# Altium PCB BEE-DAL_EXP.PcbDoc (part 1 of 5)
Units mm, origin at the board's own origin, x right, y up, seen from the top; angles counter-clockwise.
Board outline 93 x 90 mm, 6 copper layers (L1 TOP, L2 GND, L3 SIGNAL, L4 PWR, L5 GND, L6 BOT), stack 1.516 mm thick; 548 components, 447 nets, 1827 pads, 1142 vias.
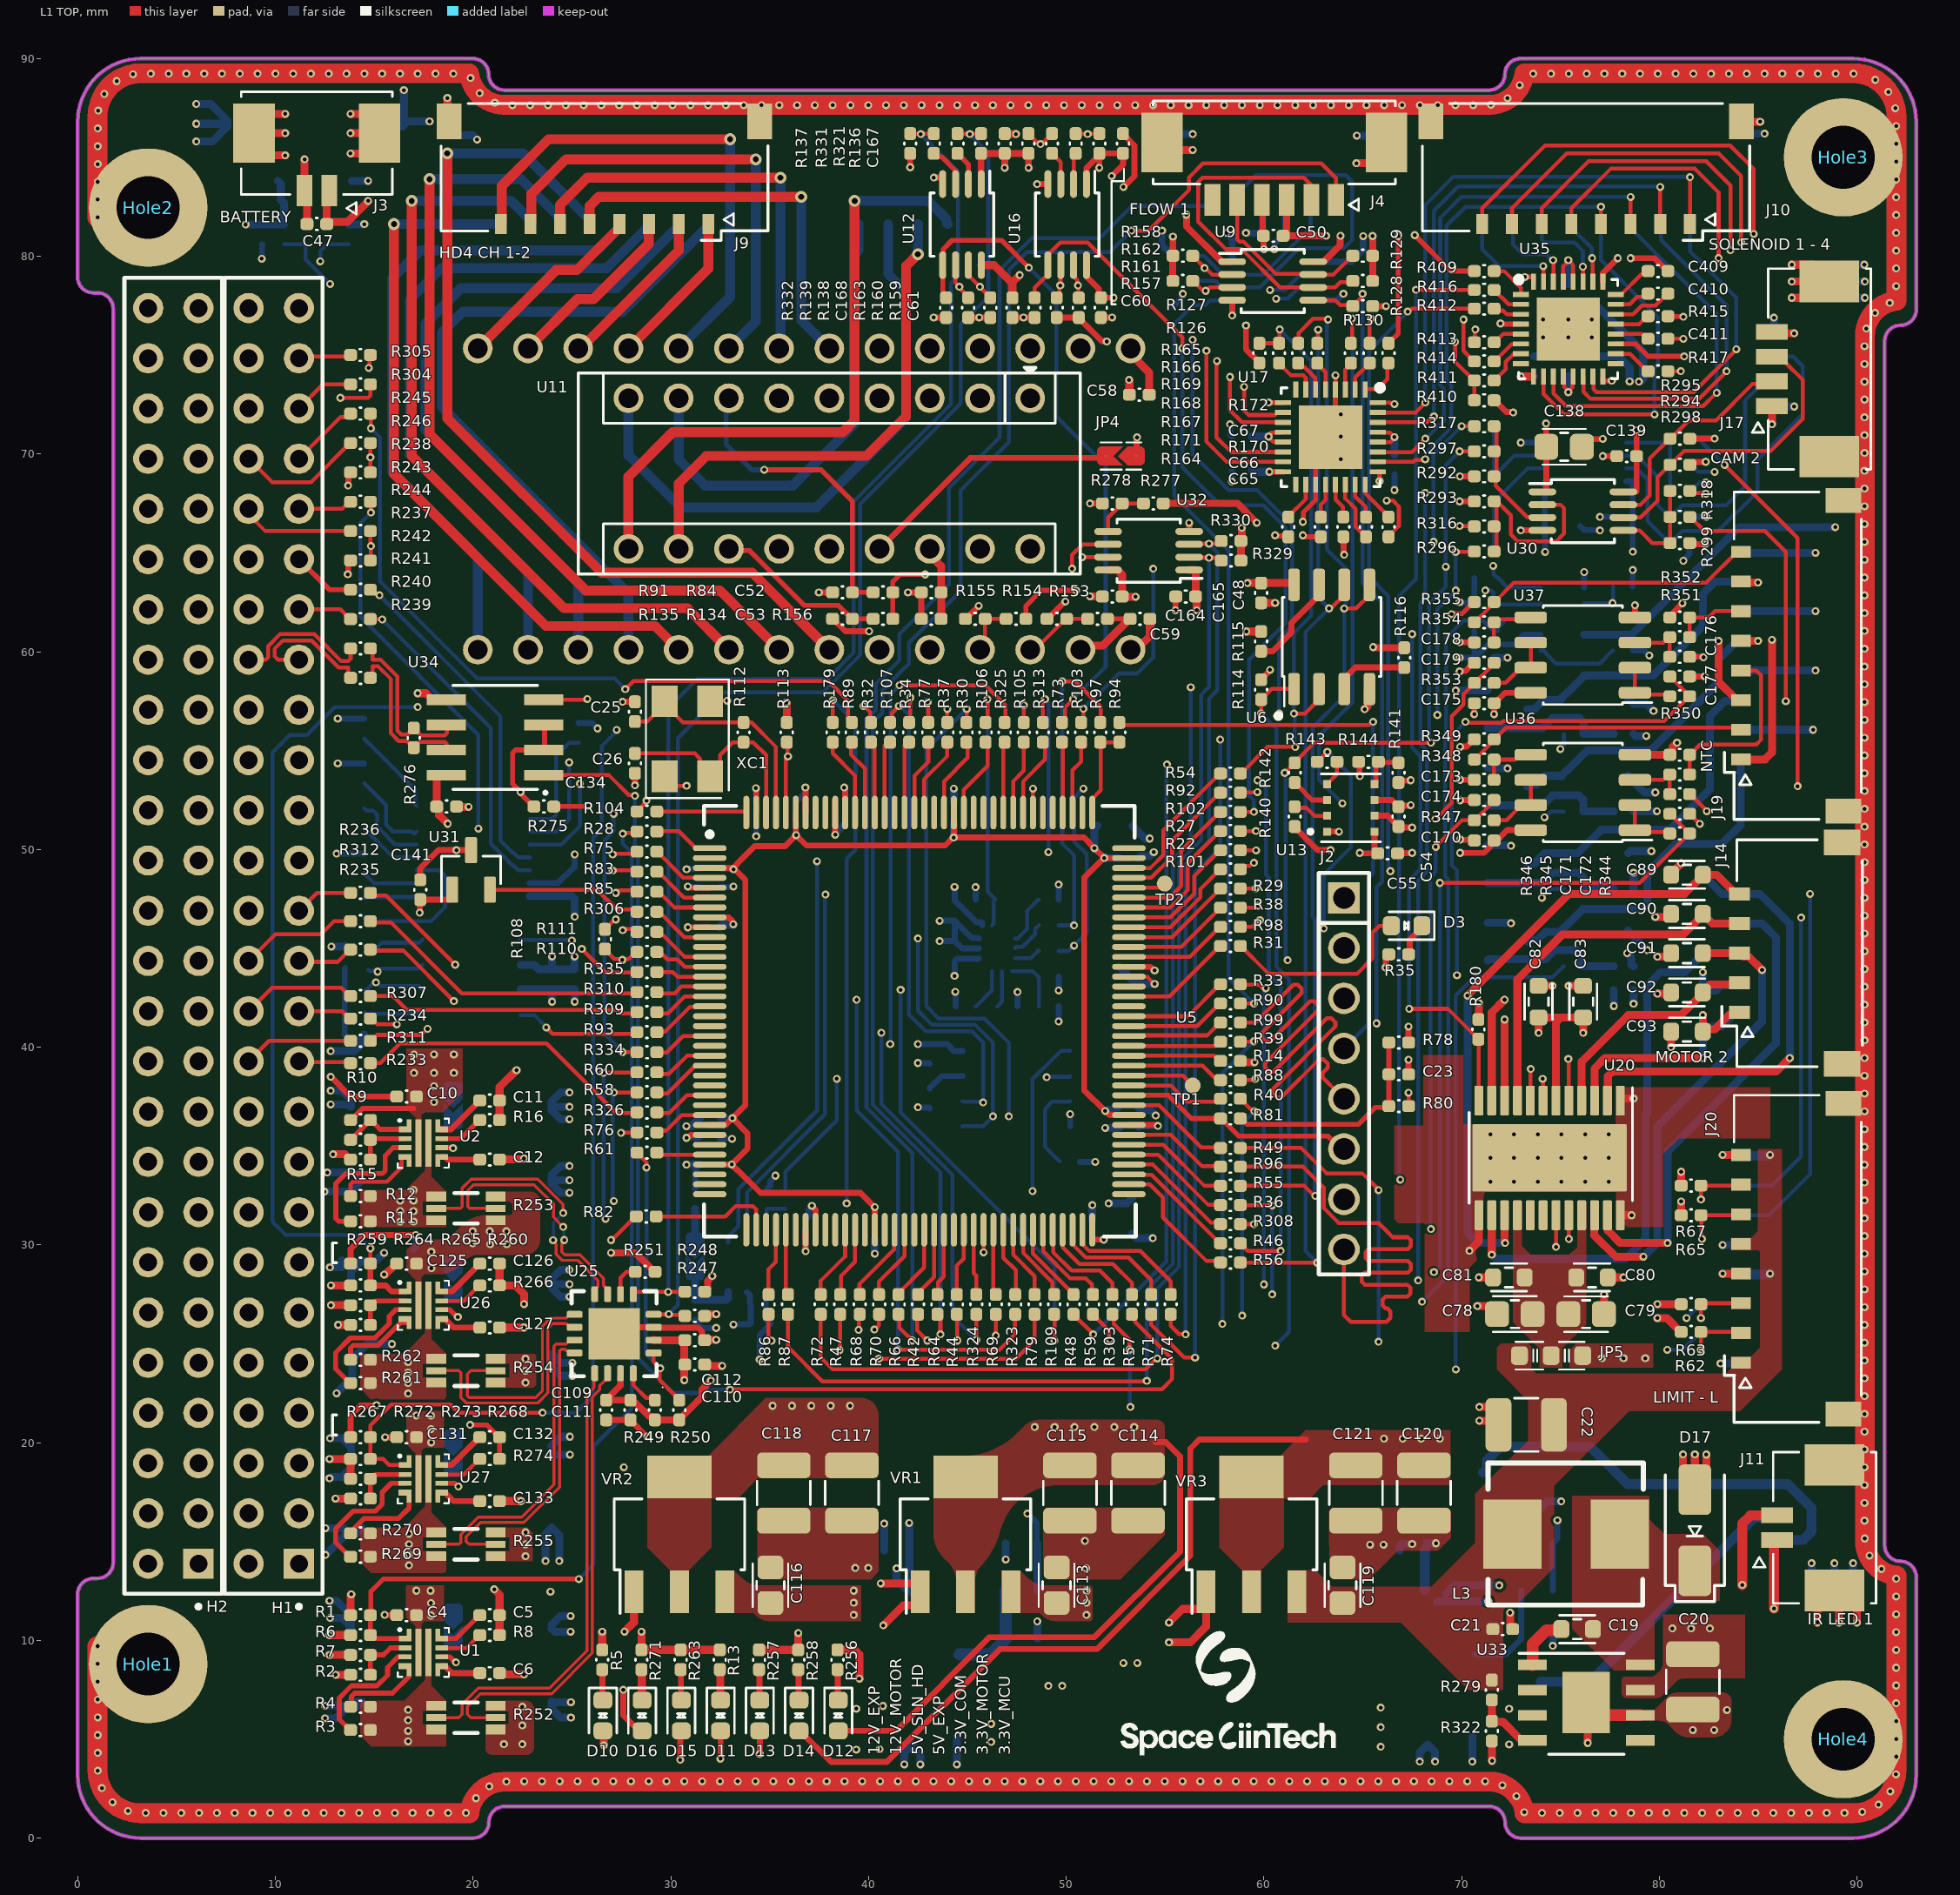
[diagram p0: L1 TOP view]
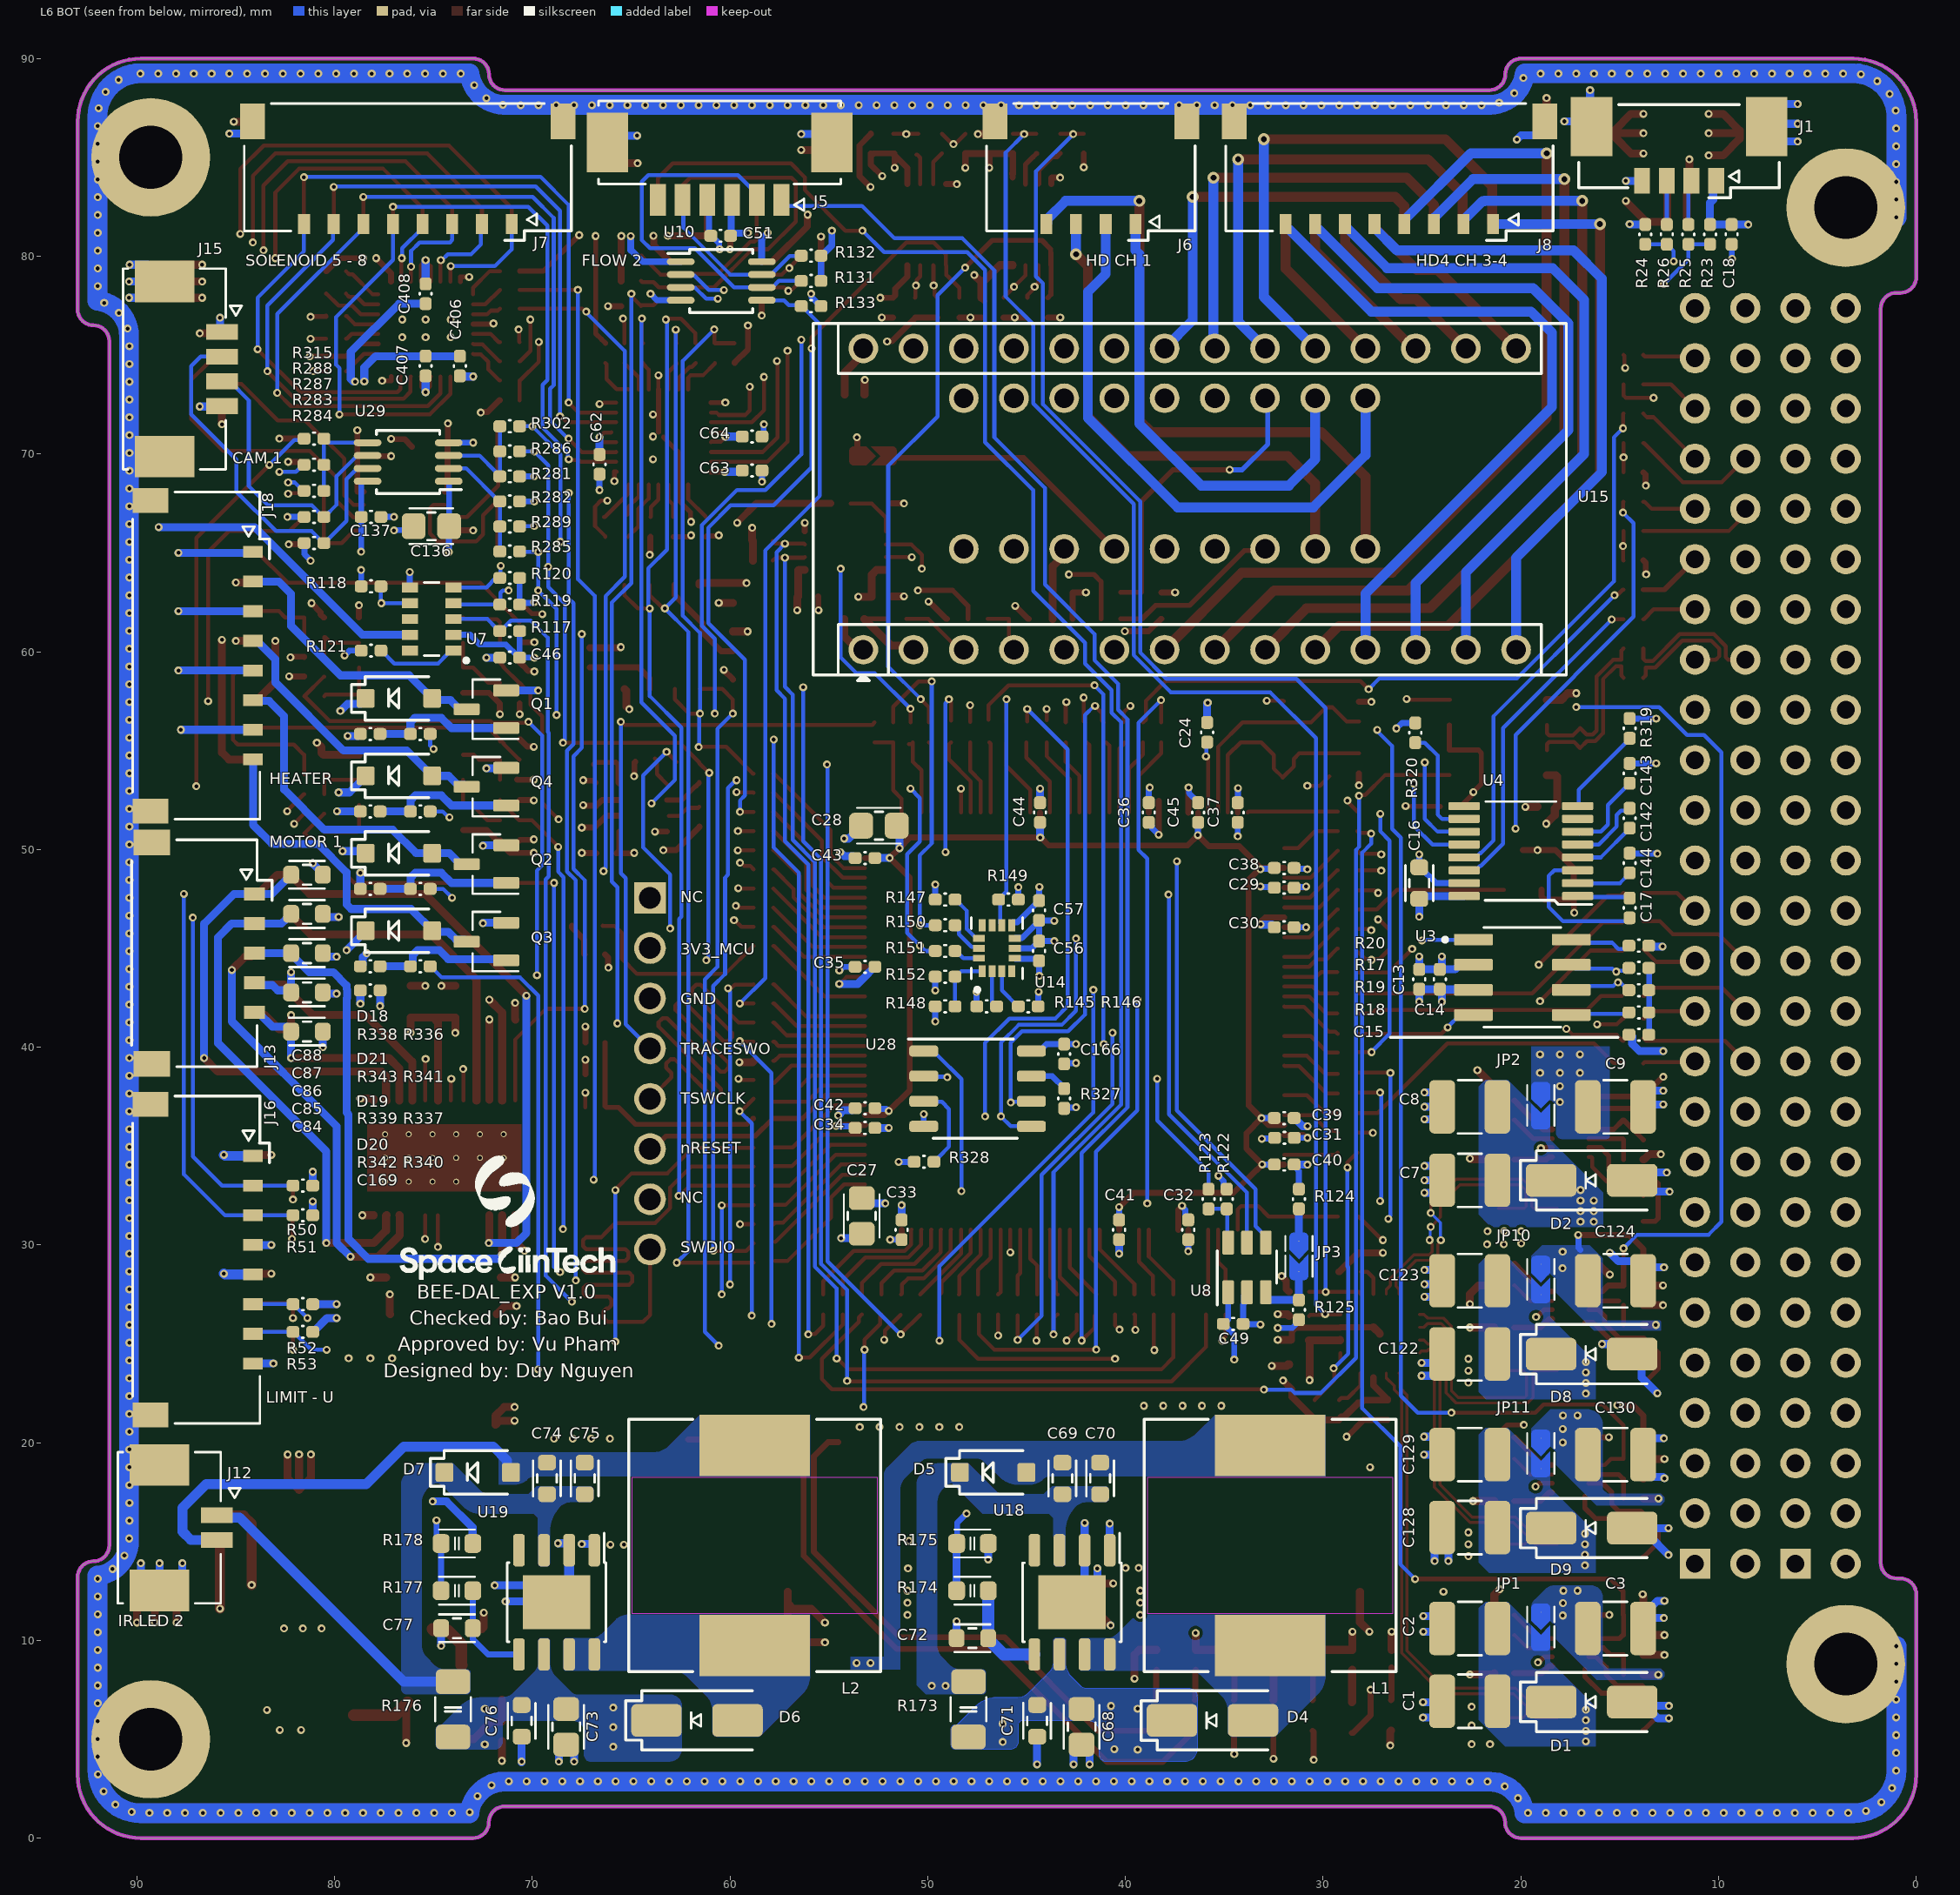
[diagram p1: L6 BOT view, seen from below]
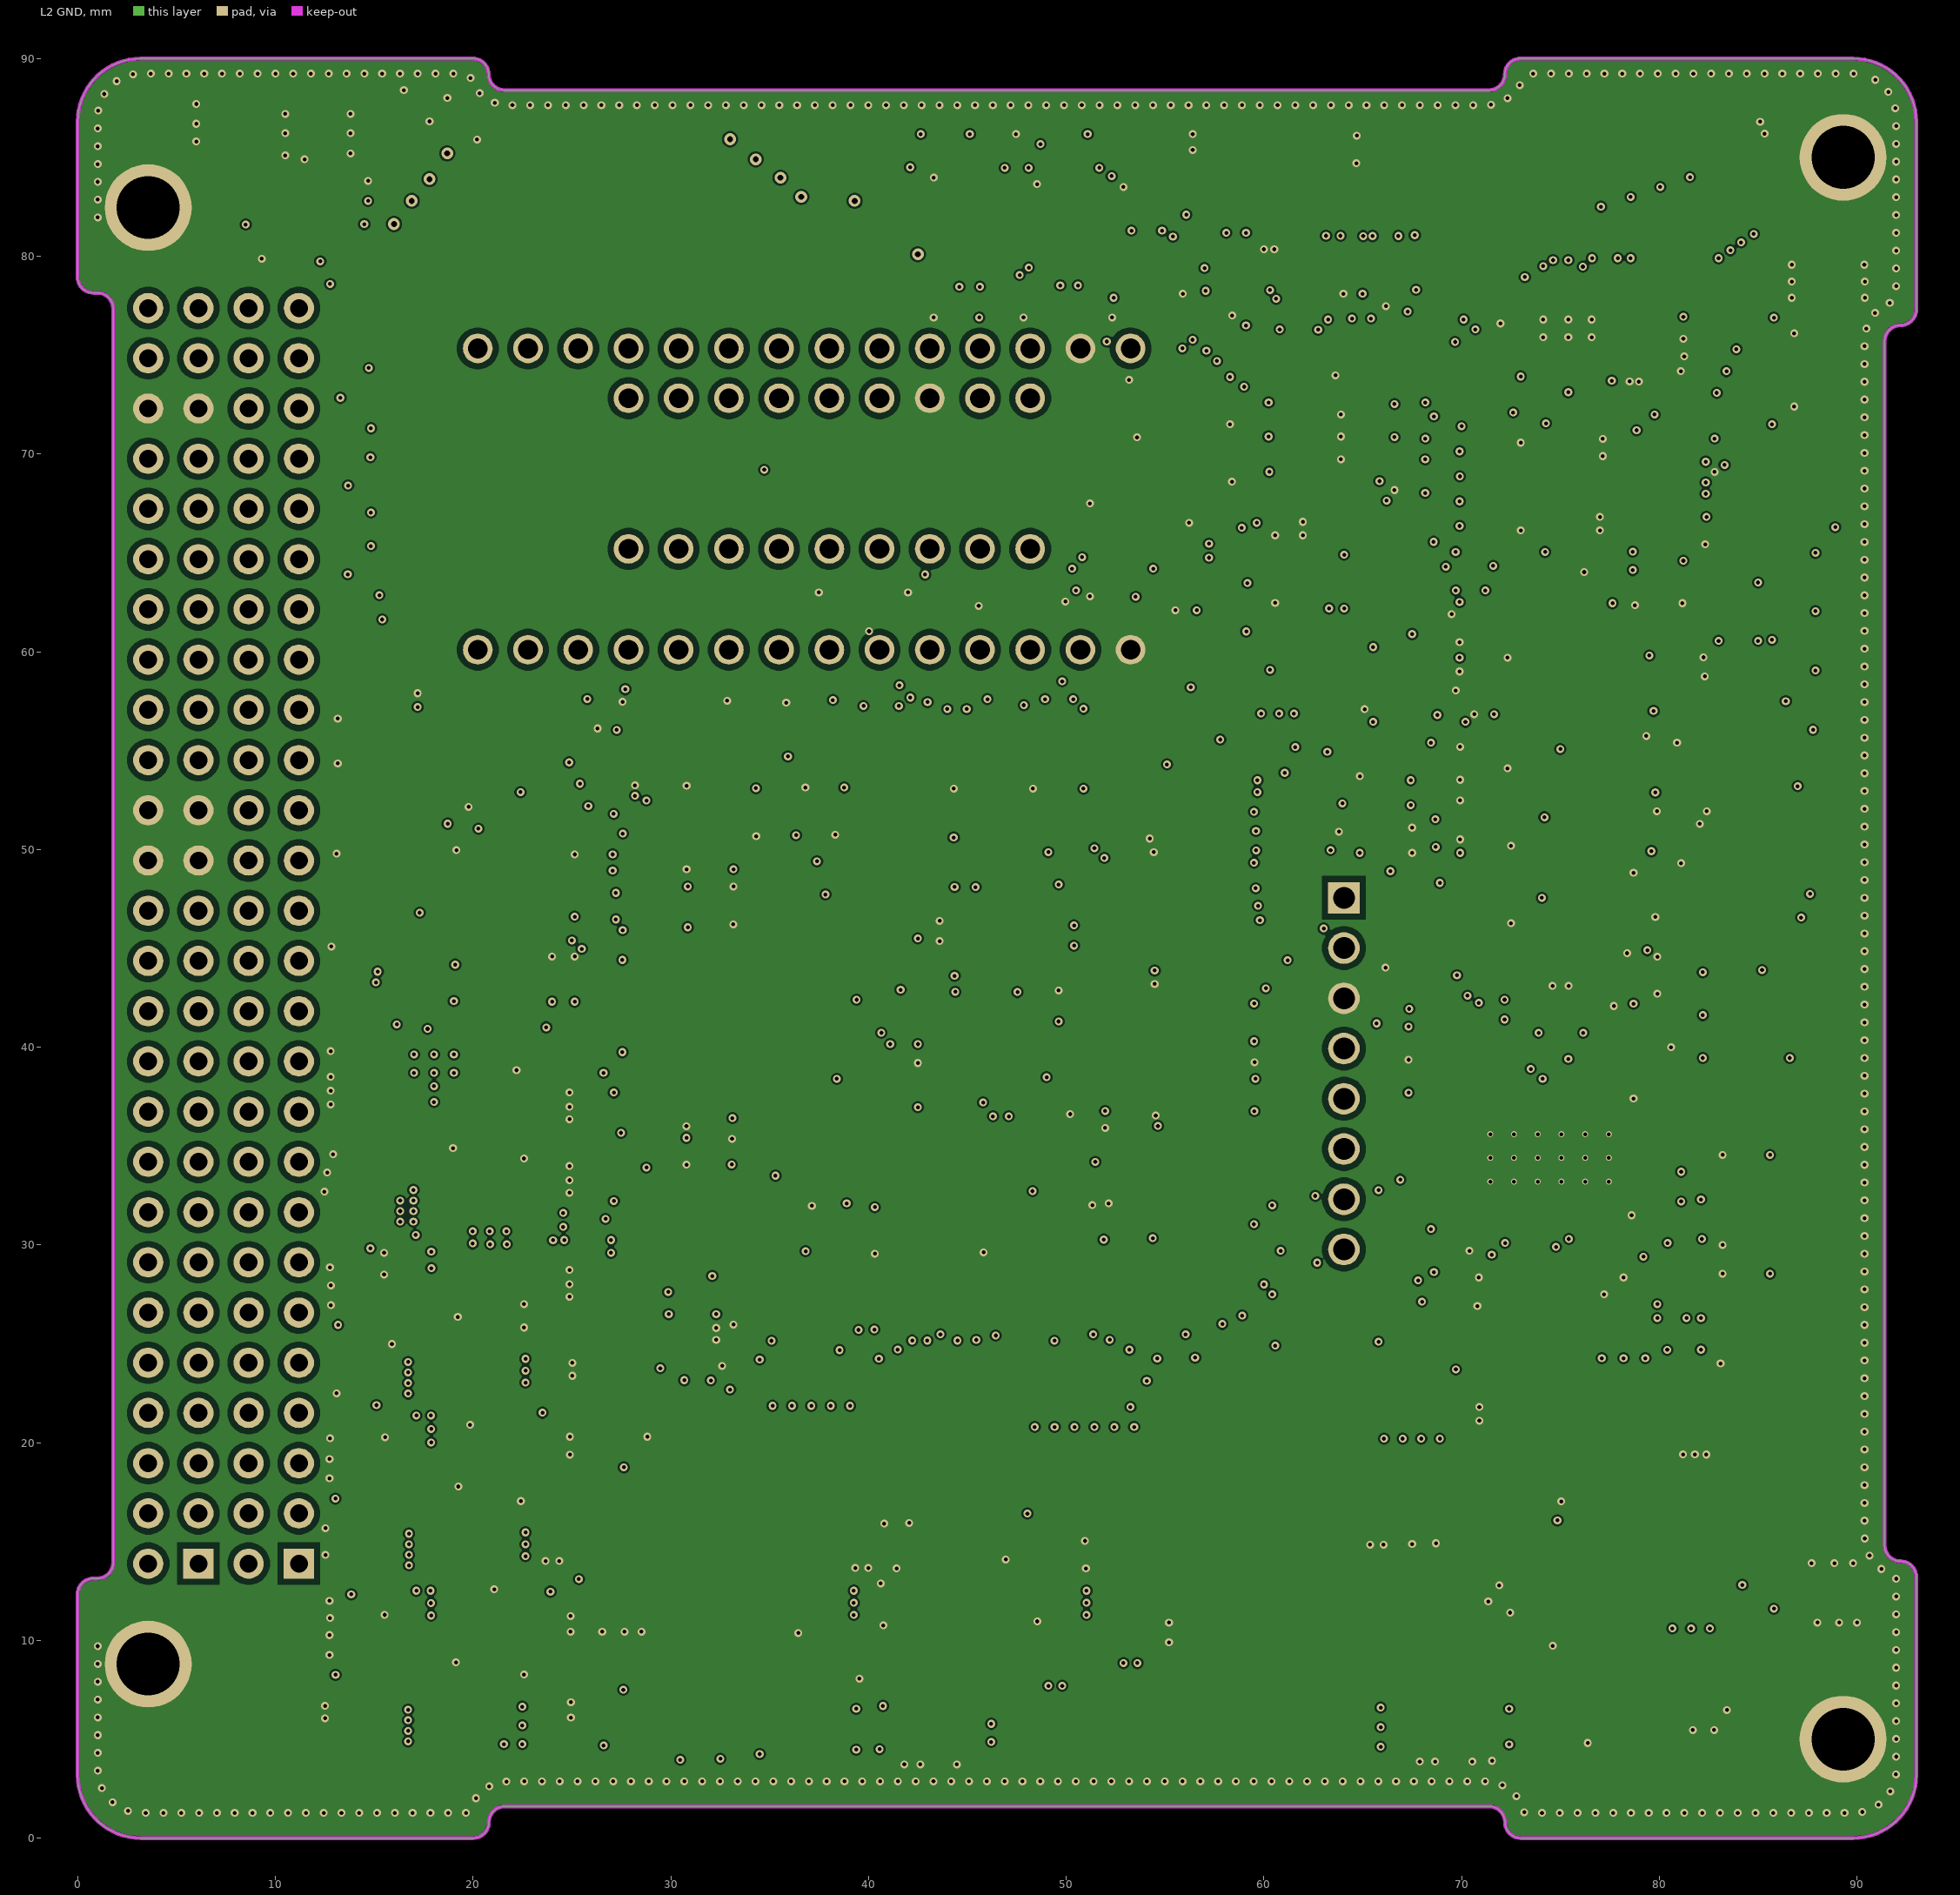
[diagram p2: L2 GND]
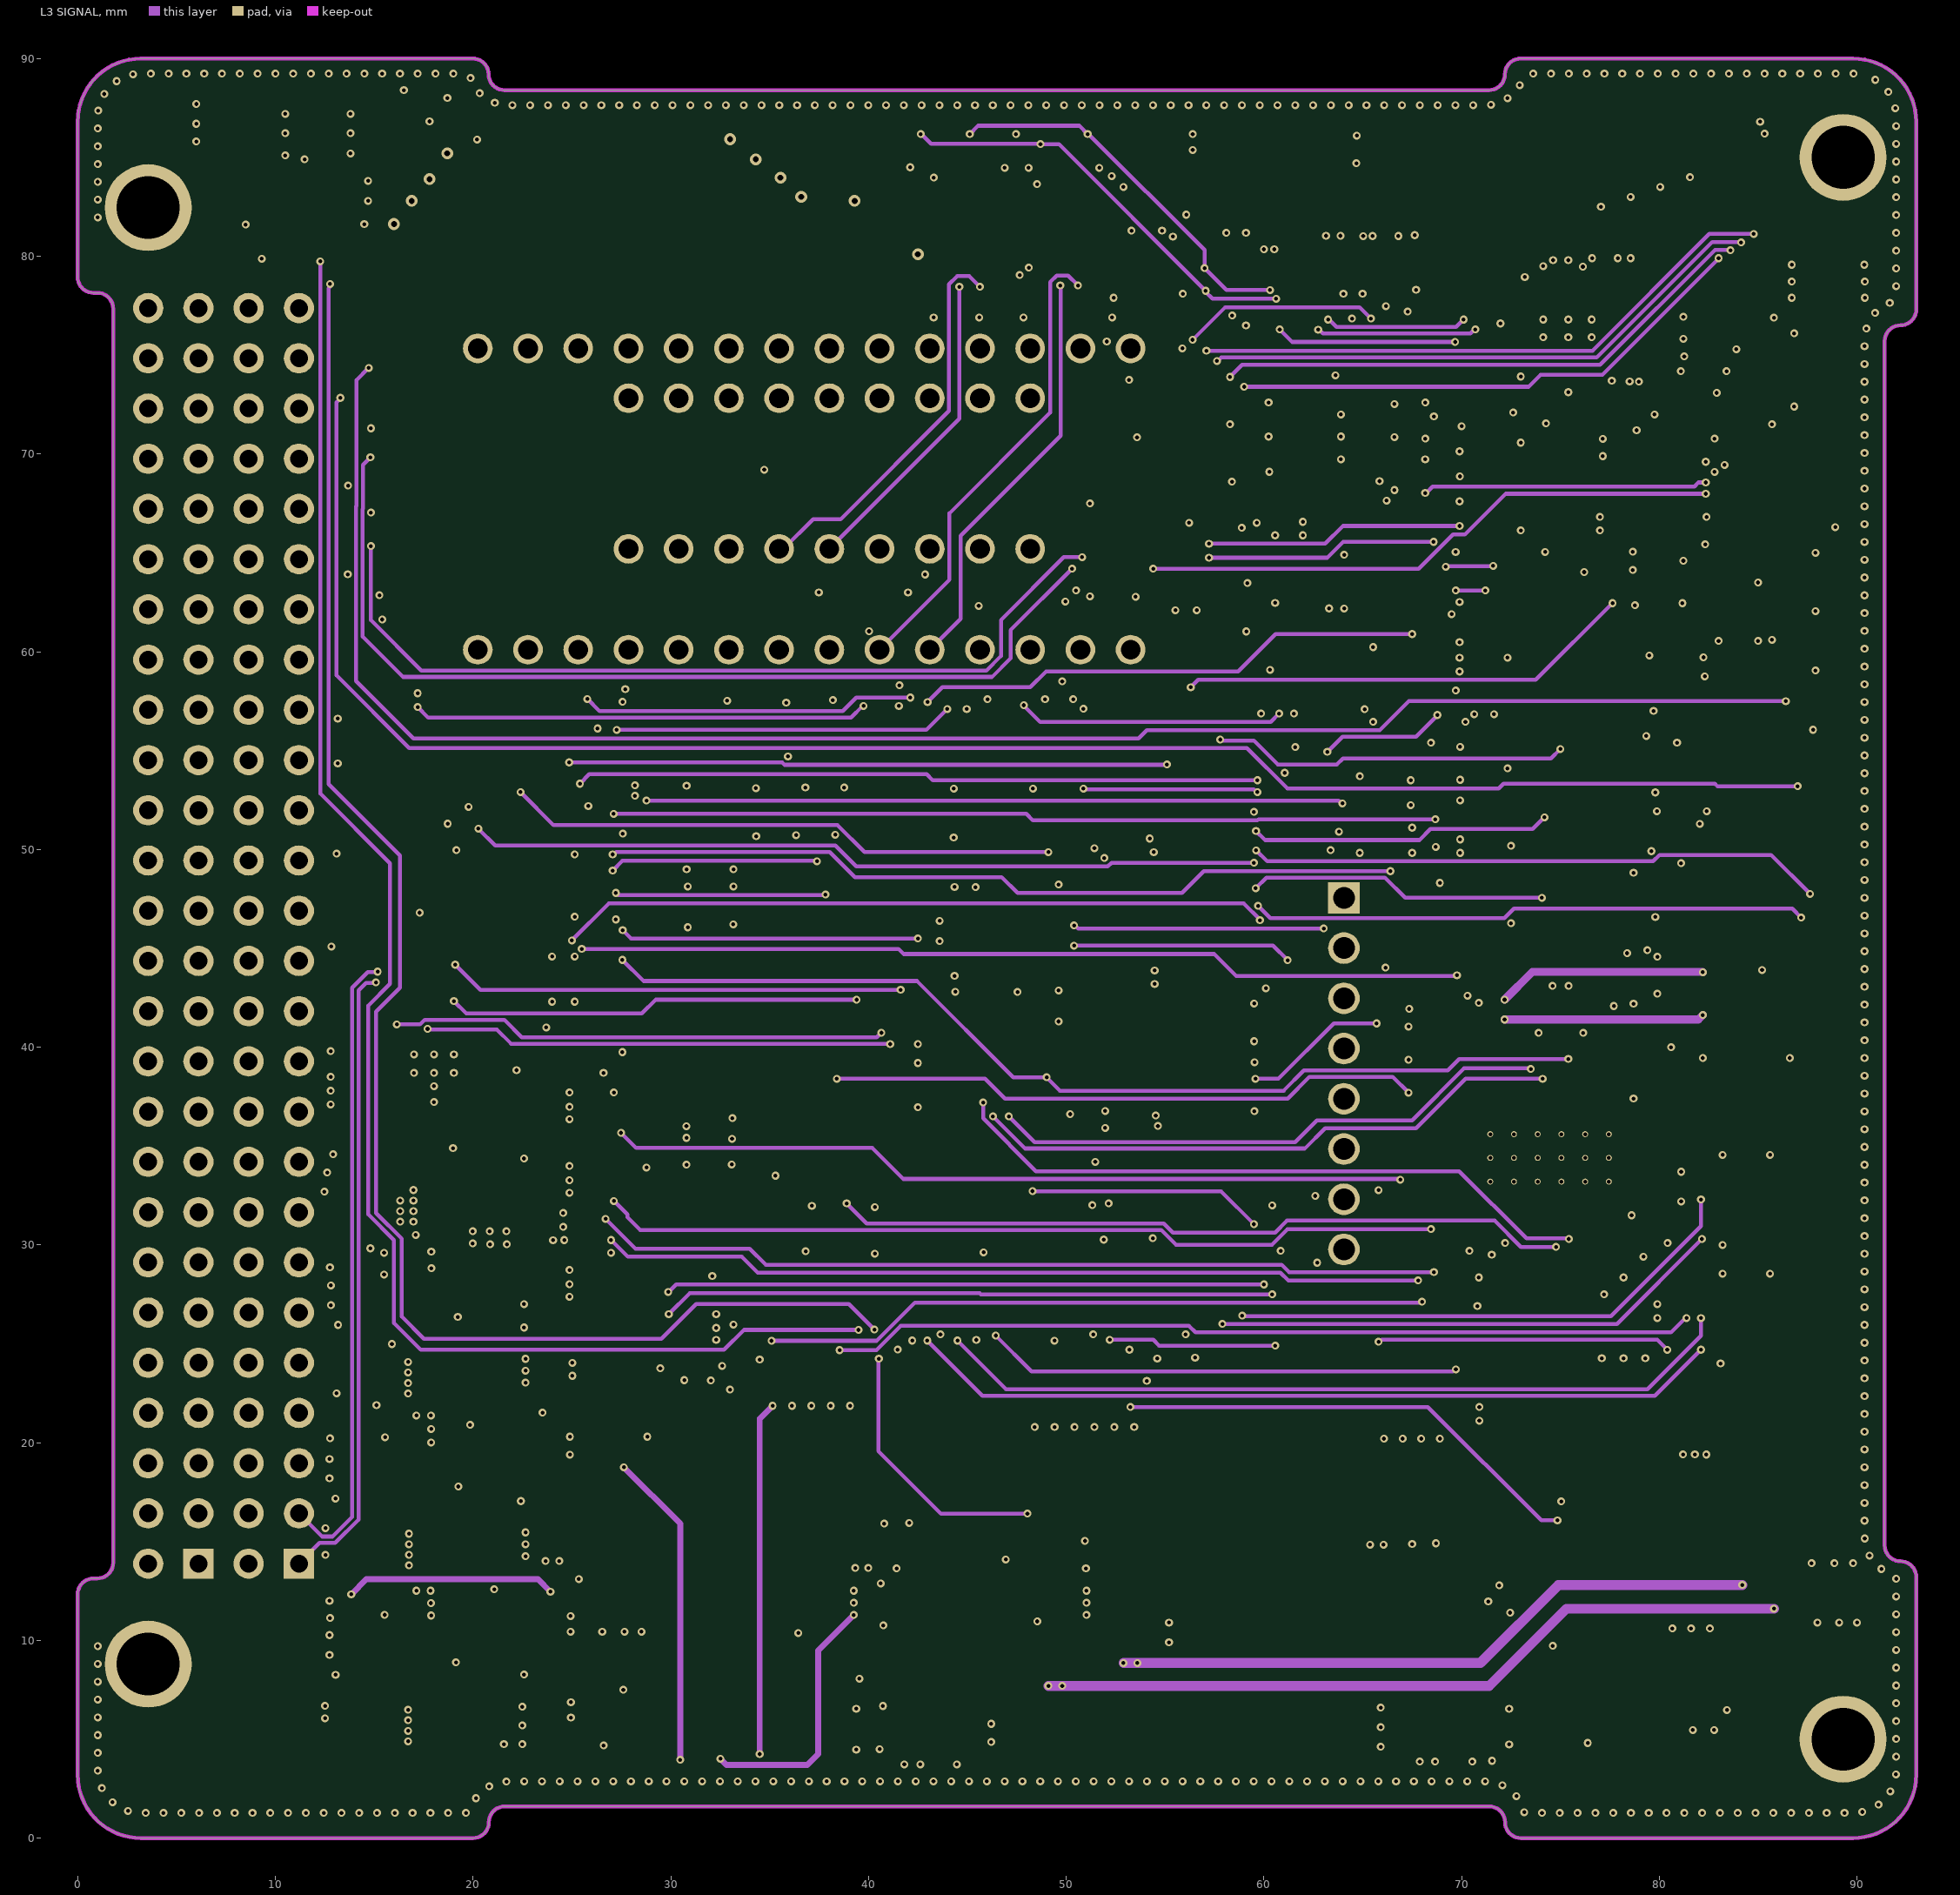
[diagram p3: L3 SIGNAL]
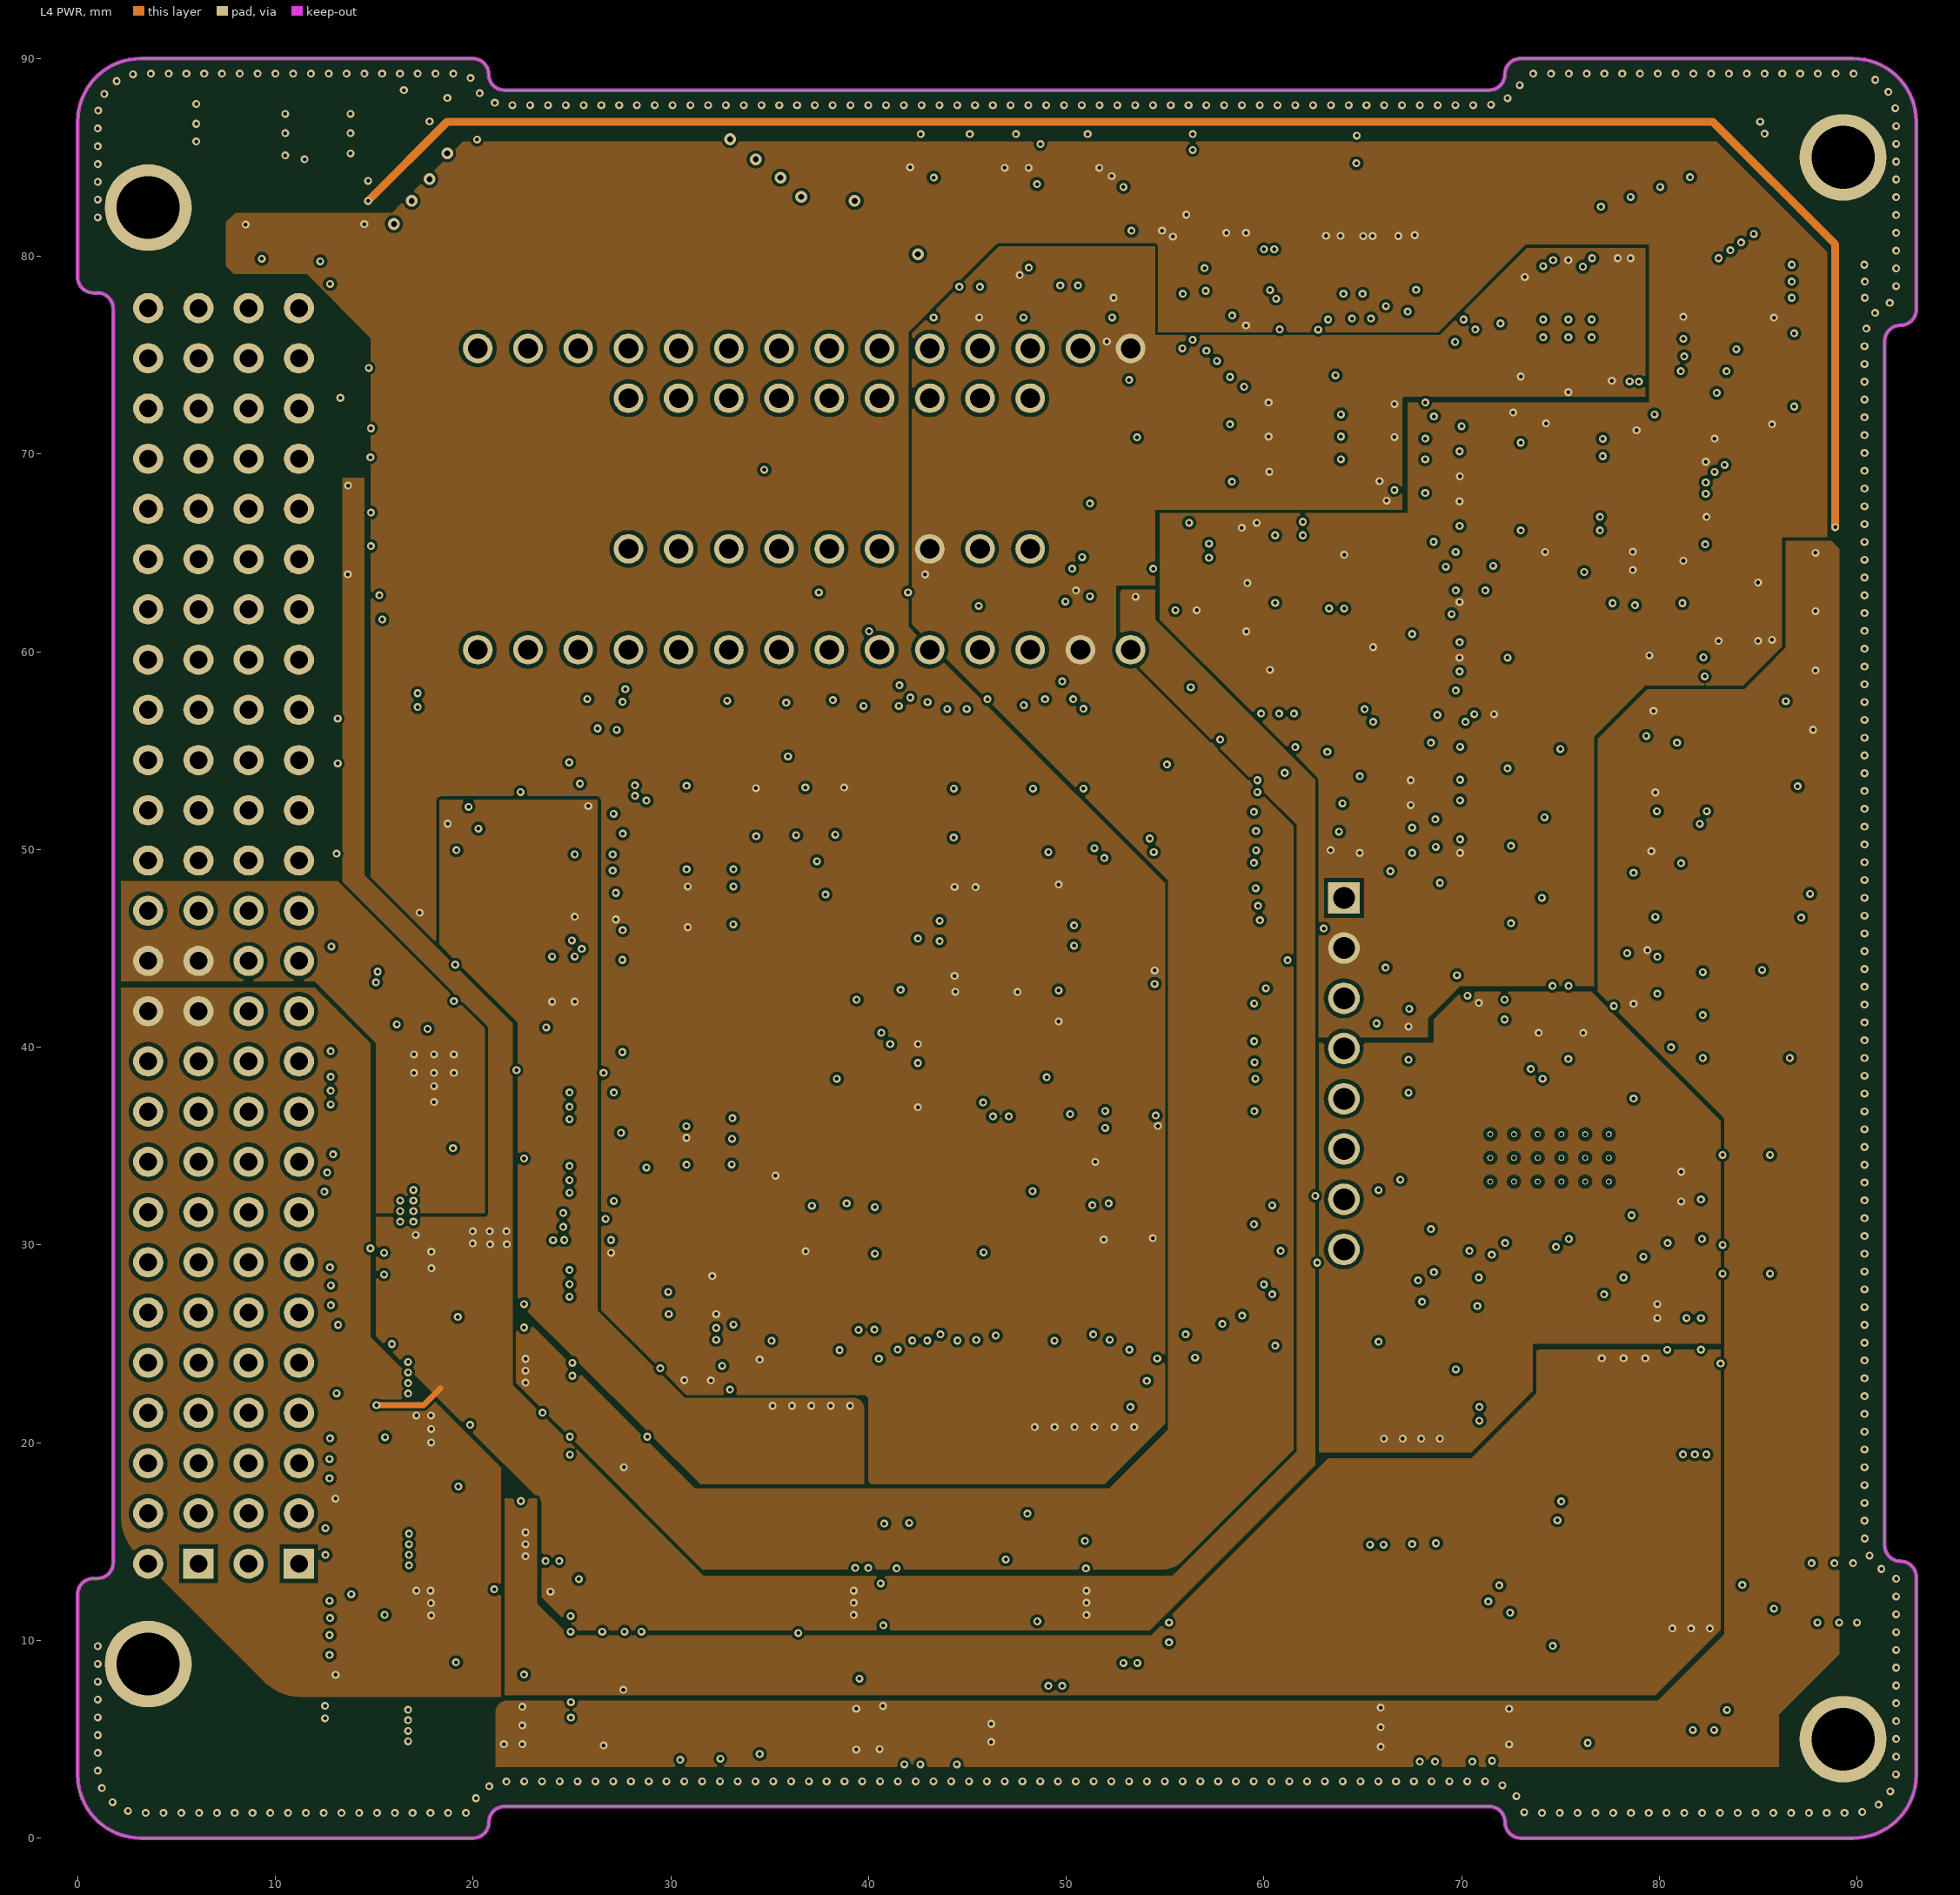
[diagram p4: L4 PWR]
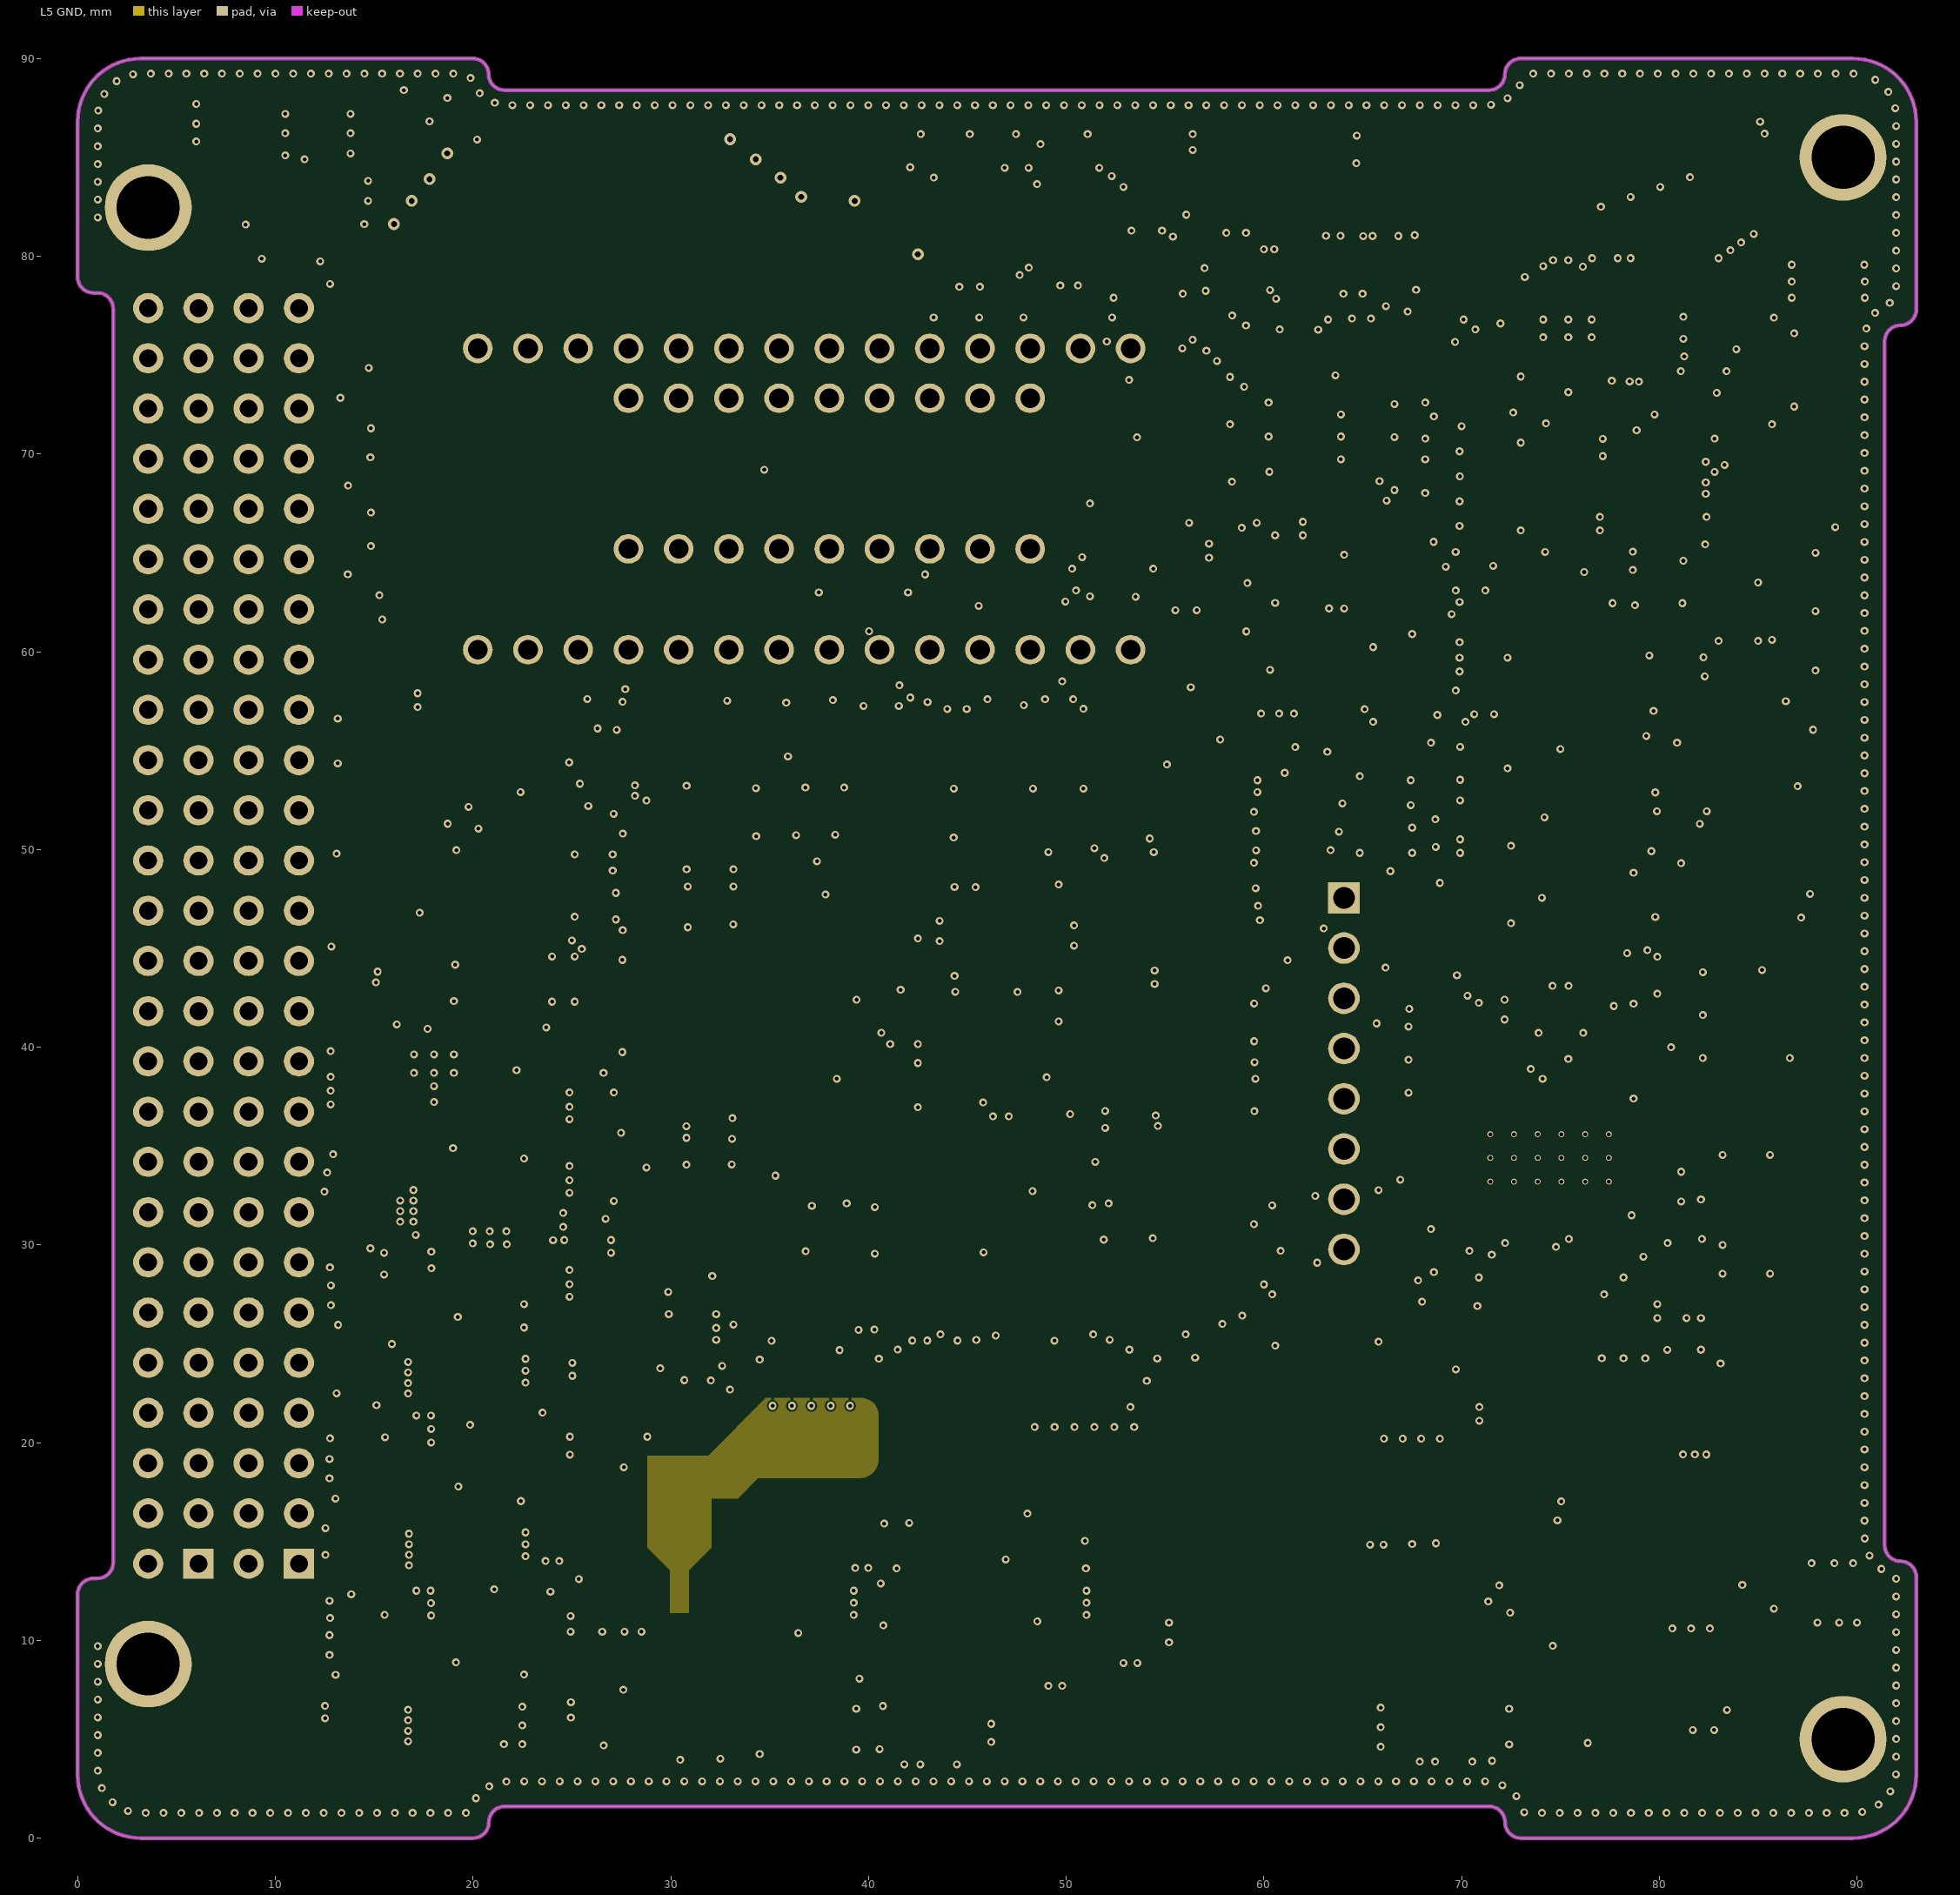
[diagram p5: L5 GND]

## Layer stack, top to bottom
Top Solder: solder mask 0.012, Solder Resist, Dk 4.3
L1 TOP: signal copper 0.018
Dielectric 2: prepreg 0.09, PP-006, Dk 4.5
L2 GND: signal copper 0.035
Dielectric 4: core 0.11, PP-006, Dk 4.1
L3 SIGNAL: signal copper 0.035
Dielectric 1: prepreg 0.94, FR-4, Dk 4.2
L4 PWR: signal copper 0.035
Dielectric 5: core 0.11, PP-006, Dk 4.1
L5 GND: signal copper 0.035
Dielectric 3: prepreg 0.09, PP-006, Dk 4.5
L6 BOT: signal copper 0.018
Bottom Solder: solder mask 0.012, Solder Resist, Dk 4.3

## Board outline
0,12.33 cw(c0.8,12.33) 0.8,13.13 1,13.13 ccw(c1,13.93) 1.8,13.93 1.8,77.35 ccw(c1,77.35) 1,78.15 0.8,78.15 cw(c0.8,78.95) 0,78.95 0,86.8 cw(c3.2,86.8) 3.193,90 3.175,90 19.989,90 cw(c19.989,89.2) 20.789,89.2 ccw(c21.589,89.2) 21.589,88.4 21.59,88.399 42.015,88.4 71.399,88.4 71.389,88.4 ccw(c71.389,89.2) 72.189,89.2 cw(c72.989,89.2) 72.989,90 89.789,90 89.807,90 cw(c89.8,86.8) 93,86.807 93,77.307 cw(c92.2,77.307) 92.2,76.507 ccw(c92.2,75.707) 91.4,75.707 91.4,14.8 ccw(c92.2,14.8) 92.2,14 cw(c92.2,13.2) 93,13.2 93,3.2 cw(c89.8,3.2) 89.8,0 73,0 cw(c73,0.8) 72.2,0.8 ccw(c71.4,0.8) 71.4,1.6 71.399,1.6 50.975,1.6 21.59,1.6 21.6,1.6 ccw(c21.6,0.8) 20.8,0.8 cw(c20,0.8) 20,0 3.2,0 cw(c3.2,3.2) 0,3.2

## Design rules (kind name [scope] priority, off if disabled: settings)
Clearance Clearance_RAM [WithinRoom('RoomRAM')] p1: gap=0.1 ignorepadtopadclearanceinfootprint=TRUE
Clearance Clearance_KEEPOUT [IsKeepOut] p2: gap=0 ignorepadtopadclearanceinfootprint=TRUE
Clearance Clearance_SAM [WithinRoom('RoomSAM')] p3: gap=0.1 ignorepadtopadclearanceinfootprint=TRUE
Clearance Clearance_BGA [WithinRoom('RoomFPGA')] p4: gap=0.075 ignorepadtopadclearanceinfootprint=FALSE
Clearance Clearance_GND_POUR [InPolygon AND (InNet('GND'))] p5: gap=0.125 ignorepadtopadclearanceinfootprint=TRUE except(0.1: SMDPad-Fill SMDPad-Poly SMDPad-Region Via-Fill Via-Poly Via-Region; 0.3: THPad-Fill THPad-Poly THPad-Region; 0.6: Arc-Fill Arc-Poly Arc-Region Track-Fill Track-Poly Track-Region)
Clearance [All] p6: gap=0.125 ignorepadtopadclearanceinfootprint=TRUE except(0.15: Arc-Fill Arc-Poly Track-Poly Track-Text SMDPad-Poly THPad-Fill Via-Fill Via-Poly Fill-Fill Fill-Poly Poly-Poly; 0.2: THPad-Poly; 0.52: Track-Fill)
ComponentClearance [All] p1: gap=0.05 collisioncheckmode=3 verticalgap=-0.1 showdistances=TRUE donotcheckwithout3dbody=TRUE
DiffPairsRouting DiffPairsRouting_Diff120 [InDifferentialPairClass('DIFFPAIR_120')] p1: maxlimit=0.254 minlimit=0.127 mostfreqgap=0.127 toplayer_maxgap=0.127 toplayer_minwidth=0.064 toplayer_maxwidth=0.064 toplayer_prefwidth=0.064 midlayer1_maxgap=0.127 midlayer1_minwidth=0.025 midlayer1_maxwidth=0.025 midlayer1_prefwidth=0.025 midlayer2_mingap=0.254 midlayer2_prefgap=0.254 midlayer2_minwidth=0.381 midlayer2_maxwidth=0.381 midlayer2_prefwidth=0.381 midlayer3_maxgap=0.127 midlayer3_minwidth=0.025 midlayer3_maxwidth=0.025 midlayer3_prefwidth=0.025 midlayer5_mingap=0.254 midlayer5_prefgap=0.254 midlayer5_minwidth=0.381 midlayer5_maxwidth=0.381 midlayer5_prefwidth=0.381 bottomlayer_maxgap=0.127 bottomlayer_minwidth=0.064 bottomlayer_maxwidth=0.064 bottomlayer_prefwidth=0.064 maxuncoupledlength=12.7
FanoutControl Fanout_BGA [IsBGA or WithinRoom('room_FPGA')] p1: bgadir=Out bgaviamode=Centered fanoutstyle=Auto fanoutdirection=Alternating viagrid=0.025 // Fanout_BGA (Default Rule)
HoleSize [All] p1: absolutevalues=TRUE maxlimit=5 minlimit=0.2 maxpercent=80.000 minpercent=20.000
HoleToHoleClearance [All] p1: gap=0.2 allowstackedmicrovias=TRUE
MatchedLengths xSignal_SWD [InxSignalClass('xSignals_SWD')] p1: tolerance=0.1 checknetsindiffpair=FALSE checkdiffpairvsdiffpair=TRUE checkxsignals=TRUE checkothers=TRUE targetsourcename=MCU_TRACESWO-PB05_PP1
MatchedLengths xSignal_SUB_LVDS [InxSignalClass('xSignals_SUB_LVDS')] p2: tolerance=0.2 checknetsindiffpair=TRUE checkdiffpairvsdiffpair=FALSE checkxsignals=FALSE checkothers=FALSE
MatchedLengths xSignal_USP_EXP_MICRO [InxSignalClass('xSignals_USB_EXP_MICRO')] p3: tolerance=0.1 checknetsindiffpair=TRUE checkdiffpairvsdiffpair=FALSE checkxsignals=FALSE checkothers=FALSE
MatchedLengths xSignal_IF_OUT_CONN_USB [InxSignalClass('xSignals_IF_OUT_CONN_USB')] p4: tolerance=0.2 checknetsindiffpair=TRUE checkdiffpairvsdiffpair=FALSE checkxsignals=FALSE checkothers=FALSE
MatchedLengths xSignal_FPGA_LVDS_TX [InxSignalClass('xSignals_FPGA_LVDS_TX')] p5: tolerance=0.1 checknetsindiffpair=TRUE checkdiffpairvsdiffpair=FALSE checkxsignals=FALSE checkothers=FALSE
MatchedLengths xSignal_FPGA_LVDS_RX [InxSignalClass('xSignals_FPGA_LVDS_RX')] p6: tolerance=0.2 checknetsindiffpair=TRUE checkdiffpairvsdiffpair=FALSE checkxsignals=FALSE checkothers=FALSE
MatchedLengths xSignal_USB_HOST_SAM_CONN [InxSignalClass('xSignals_USB_HOST_SAM_CONN')] p7: tolerance=0.1 checknetsindiffpair=TRUE checkdiffpairvsdiffpair=FALSE checkxsignals=FALSE checkothers=FALSE
MatchedLengths xSignal_USB_EXP_SW [InxSignalClass('xSignals_EXP_USB_SW')] p8: tolerance=0.1 checknetsindiffpair=TRUE checkdiffpairvsdiffpair=FALSE checkxsignals=FALSE checkothers=FALSE
MatchedLengths xSignal_JTAG_SAM [InxSignalClass('xSignals_JTAG_SAM')] p9: tolerance=0.1 checknetsindiffpair=FALSE checkdiffpairvsdiffpair=TRUE checkxsignals=TRUE checkothers=TRUE targetsourcename=TDI_PC28_PP1
MatchedLengths xSignal_JTAG_FPGA [InxSignalClass('xSignals_JTAG_FPGA')] p10: tolerance=0.1 checknetsindiffpair=FALSE checkdiffpairvsdiffpair=TRUE checkxsignals=TRUE checkothers=TRUE targetsourcename=JTAG_TCK_PP1
MatchedLengths xSignal_SPI_CONNECTOR [InxSignalClass('xSignals_SPI_CONNECTOR')] p11: tolerance=5 checknetsindiffpair=FALSE checkdiffpairvsdiffpair=TRUE checkxsignals=TRUE checkothers=TRUE targetsourcename=CLK_EXP_CONNECTOR-NetR95_1-_PA26_PP1
MatchedLengths xSignal_eMMC [InxSignalClass('xSignals_eMMC')] p12: tolerance=0.1 checknetsindiffpair=FALSE checkdiffpairvsdiffpair=TRUE checkxsignals=TRUE checkothers=TRUE targetsourcename=SOM_SDMMC0_OUT_D7-_PA10_PP1
MatchedLengths xSignal_SAM_SPI_SW_FLASH [InxSignalClass('xSignals_SAMA7_FLASH_SPI')] p13: tolerance=0.1 checknetsindiffpair=FALSE checkdiffpairvsdiffpair=TRUE checkxsignals=TRUE checkothers=TRUE targetsourcename=SAMA7_FLASH_SPI_MCLK-_PB5_PP1
MatchedLengths xSignal_RS422 [InxSignalClass('xSignals_RS422')] p14: tolerance=0.1 checknetsindiffpair=TRUE checkdiffpairvsdiffpair=FALSE checkxsignals=FALSE checkothers=FALSE
MatchedLengths xSignal_RS422_EXP_PC104 [InxSignalClass('xSignals_RS422_EXP_PC104')] p15: tolerance=0.2 checknetsindiffpair=TRUE checkdiffpairvsdiffpair=FALSE checkxsignals=FALSE checkothers=FALSE
MatchedLengths xSignal_SDCARD [InxSignalClass('xSignals_SDCARD')] p16: tolerance=0.1 checknetsindiffpair=FALSE checkdiffpairvsdiffpair=TRUE checkxsignals=TRUE checkothers=TRUE targetsourcename=SD2_DATA2-_PC1_PP1
MatchedLengths xSignal_MRAM [InxSignalClass('xSignal_MRAM')] p17: tolerance=0.1 checknetsindiffpair=FALSE checkdiffpairvsdiffpair=TRUE checkxsignals=TRUE checkothers=TRUE targetsourcename=SOM_MRAM_QSPI_CLK-_PB14_PP1
MatchedLengths MRAM [InNetClass('QSPI')] p18: tolerance=0.5 checknetsindiffpair=FALSE checkdiffpairvsdiffpair=TRUE checkxsignals=TRUE checkothers=TRUE
MinimumSolderMaskSliver MinimumSolderMaskSliver_BGA [WithinRoom('ROOM_SAMA7')] p1: minsoldermaskwidth=0.05
MinimumSolderMaskSliver [All] p2: minsoldermaskwidth=0.05
PolygonConnect PolygonConnect_1 [HasFootprint('5040500691', 'MOLEX_5040500491','MOLEX_5040500891','MOLEX_0532610471','5040500591','5040500991','47346-0001_MOL','MOLEX_5040500991','5040500691','MOLEX_0532610271') vs IsNamedPolygon('GND_POUR')] p1: thpad.connectstyle=Relief thpad.reliefconductorwidth=0.254 thpad.reliefentries=4 thpad.polygonreliefangle="90 Angle" thpad.airgapwidth=0.254 smdpad.connectstyle=Direct smdpad.reliefconductorwidth=0.254 smdpad.reliefentries=4 smdpad.polygonreliefangle="90 Angle" smdpad.airgapwidth=0.254 via.connectstyle=Direct via.reliefconductorwidth=0.254 via.reliefentries=4 via.polygonreliefangle="90 Angle" via.airgapwidth=0.254
PolygonConnect PolygonConnect_2 [All vs IsNamedPolygon('GND_POUR')] p2: thpad.connectstyle=Relief thpad.reliefconductorwidth=0.254 thpad.reliefentries=4 thpad.polygonreliefangle="90 Angle" thpad.airgapwidth=0.254 smdpad.connectstyle=Relief smdpad.reliefconductorwidth=0.254 smdpad.reliefentries=4 smdpad.polygonreliefangle="90 Angle" smdpad.airgapwidth=0.254 via.connectstyle=Direct via.reliefconductorwidth=0.254 via.reliefentries=4 via.polygonreliefangle="90 Angle" via.airgapwidth=0.254
PolygonConnect [All] p3: connectstyle=Direct reliefconductorwidth=0.254 reliefentries=4 polygonreliefangle="90 Angle" airgapwidth=0.254
RoutingLayers [All] p1: top layer_v5=TRUE mid layer 1_v5=TRUE mid layer 2_v5=FALSE mid layer 3_v5=TRUE mid layer 5_v5=TRUE bottom layer_v5=TRUE
RoutingVias RoutingVias_fpga [WithinRoom('room_fpga')] p1: holewidth=0.2 width=0.4 viastyle="Through Hole" minholewidth=0.2 minwidth=0.4 maxholewidth=0.2 maxwidth=0.4
RoutingVias RoutingVias_BGA [WithinRoom('ROOM_SAMA7')] p2: holewidth=0.2 width=0.4 viastyle="Through Hole" minholewidth=0.2 minwidth=0.4 maxholewidth=0.2 maxwidth=0.4
RoutingVias [All] p3: holewidth=0.2 width=0.4 viastyle="Through Hole" minholewidth=0.2 minwidth=0.4 maxholewidth=0.5 maxwidth=1
SilkToSilkClearance [All] p1: silktosilkclearance=0.125
SilkToSolderMaskClearance [IsPad] p1: minsilkscreentomaskgap=0.1 clearancetoexposedcopper=TRUE
SolderMaskExpansion SolderMaskExpansion_Via [IsVia] p1: expansion=0.102 istentingtop=TRUE
SolderMaskExpansion [All] p2: expansion=0.102 istentingtop=FALSE
SupplyNets "Schematic Supply Nets_3" [InNet('12V/5V_MOTOR')] p1: voltage=0.000
SupplyNets "Schematic Supply Nets_1" [InNet('12V_MOTOR_eFuse')] p2: voltage=0.000
SupplyNets "Schematic Supply Nets" [InNet('12V_MOTOR')] p3: voltage=0.000
SupplyNets "Schematic Supply Nets_43" [InNet('3.3V_COM')] p4: voltage=0.000
SupplyNets "Schematic Supply Nets_42" [InNet('5V_MOTOR')] p5: voltage=0.000
SupplyNets "Schematic Supply Nets_41" [InNet('efuse_STX_12V')] p6: voltage=0.000
SupplyNets "Schematic Supply Nets_40" [InNet('5V_SLN_HD')] p7: voltage=0.000
SupplyNets "Schematic Supply Nets_39" [InNet('12V_EXP')] p8: voltage=0.000
SupplyNets "Schematic Supply Nets_37" [InNet('efuse_BUS_5V')] p9: voltage=0.000
SupplyNets "Schematic Supply Nets_36" [InNet('3.3V_MCU')] p10: voltage=0.000
SupplyNets "Schematic Supply Nets_35" [InNet('+VDDCORE')] p11: voltage=0.000
SupplyNets "Schematic Supply Nets_34" [InNet('3.3V_MOTOR')] p12: voltage=0.000
SupplyNets "Schematic Supply Nets_33" [InNet('5V_SLN_HD_eFuse')] p13: voltage=0.000
SupplyNets "Schematic Supply Nets_32" [InNet('5V_EXP')] p14: voltage=0.000
SupplyNets "Schematic Supply Nets_19" [InNet('GND')] p15: voltage=0.000
SupplyNets "Schematic Supply Nets_14" [InNet('STX_12V')] p16: voltage=0.000
SupplyNets "Schematic Supply Nets_11" [InNet('3.3_VBAT')] p17: voltage=0.000
SupplyNets "Schematic Supply Nets_10" [InNet('BUS_5V')] p18: voltage=0.000
Width Width_BGA [WithinRoom('ROOM_SAMA7')] p1: maxlimit=0.5 minlimit=0.1 preferedwidth=0.254 toplayer_prefwidth=0.25 midlayer2_prefwidth=0.25 midlayer3_prefwidth=0.25 midlayer5_prefwidth=0.25 bottomlayer_prefwidth=0.25 minimp=50.000000 maximp=50.000000 favimp=50.000000
Width Width_FPGA [WithinRoom('RoomFPGA')] p2: maxlimit=0.5 minlimit=0.075 preferedwidth=0.15 toplayer_minwidth=0.1 toplayer_prefwidth=0.1 midlayer1_minwidth=0.1 midlayer2_minwidth=0.1 midlayer2_prefwidth=0.1 midlayer3_minwidth=0.1 midlayer3_prefwidth=0.1 midlayer5_minwidth=0.1 midlayer5_prefwidth=0.1 bottomlayer_prefwidth=0.1 minimp=50.000000 maximp=50.000000 favimp=50.000000
Width Width_Sing50 [InNetClass('QSPI') or InNetClass('50_eMMC1_MCU') or InNetClass('SD_CARD') or InNetClass('MRAM_SAMA7')] p3: maxlimit=0.364 minlimit=0.1 preferedwidth=0.364 toplayer_minwidth=0.16 toplayer_maxwidth=0.16 toplayer_prefwidth=0.16 midlayer1_minwidth=0.125 midlayer1_maxwidth=0.125 midlayer1_prefwidth=0.125 bottomlayer_minwidth=0.16 bottomlayer_maxwidth=0.16 bottomlayer_prefwidth=0.16 impedanceprofiledriven=TRUE minimp=50.000000 maximp=50.000000 favimp=50.000000
Width [All] p4: maxlimit=2 minlimit=0.075 preferedwidth=0.2 toplayer_minwidth=0.1 midlayer1_minwidth=0.1 midlayer2_minwidth=0.1 midlayer2_prefwidth=0.125 midlayer3_minwidth=0.1 midlayer5_minwidth=0.1 midlayer5_prefwidth=0.125 bottomlayer_prefwidth=2 minimp=50.000000 maximp=50.000000 favimp=50.000000
21 further rules are at their usual default settings.

## Classes and differential pairs
component class NTC: C170 C171 C172 C173 C174 C175 C176 C177 C178 C179 J19 R344 R345 R346 R347 R348 R349 R350 R351 R352 R353 R354 R355 U36 U37
component class LIMIT_SENSORS: J16 J20 R50 R51 R52 R53 R62 R63 R65 R67
component class HEATER: C169 D18 D19 D20 D21 J18 Q1 Q2 Q3 Q4 R336 R337 R338 R339 R340 R341 R342 R343
differential pair class DIFF100: CAN PC104_RS485 RS_485
net class POWER: 3.3V_COM 3.3V_MCU 3.3V_MOTOR 5V_EXP 5V_MOTOR 5V_SLN_HD 5V_SLN_HD_eFuse 12V_EXP 12V_MOTOR 12V_MOTOR_eFuse BUS_5V efuse_BUS_5V efuse_STX_12V STX_12V
net class HD: HD4_CH11+ HD4_CH11- HD4_CH12+ HD4_CH12- HD4_CH21+ HD4_CH21- HD4_CH22+ HD4_CH22- HD4_CH31+ HD4_CH31- HD4_CH32+ HD4_CH32- HD4_CH41+ HD4_CH41- HD4_CH42+ HD4_CH42- HD_CH1+ HD_CH1- HD_CH2+ HD_CH2-
component class HALF_BRIDGE_DRIVER: C78 C79 C80 C81 C82 C83 C84 C85 C86 C87 C88 C89 C90 C91 C92 C93 DZ1 J13 J14 JP5 R180 U20
component class 12_RS485_R232: C16 C17 C134 C142 C143 C144 R275 R276 R319 R320 U4 U34
component class 05_POWER_EFUSE: C1 C2 C3 C4 C5 C6 C7 C8 C9 C10 C11 C12 D1 D2 D10 D11 JP1 JP2 R1 R2 R3 R4 R5 R6 R7 R8 R9 R10 R11 R12 R13 R15 R16 U1 U2
component class 18_IR_LED: C68 C69 C70 C71 C72 C73 C74 C75 C76 C77 D4 D5 D6 D7 J11 J12 L1 L2 R173 R174 R175 R176 R177 R178 U18 U19
component class 07_FUNCTION_EFUSE: C122 C123 C124 C125 C126 C127 C128 C129 C130 C131 C132 C133 D8 D9 D15 D16 JP10 JP11 R259 R260 R261 R262 R263 R264 R265 R266 R267 R268 R269 R270 R271 R272 R273 R274 U26 U27
component class 17_CAM_CONNECTOR: C136 C137 C138 C139 J15 J17 R281 R282 R283 R284 R285 R286 R287 R288 R289 R292 R293 R294 R295 R296 R297 R298 R299 R302 R315 R316 R317 R318 U29 U30
component class 16_SOLENOID_HB_1: C62 C63 C64 C65 C66 C67 C406 C407 C408 C409 C410 C411 J7 J10 R164 R165 R166 R167 R168 R169 R170 R171 R172 R409 R410 R411 R412 R413 R414 R415 R416 R417 U17 U35
component class 15_HD_PUMP: C52 C53 C58 C59 C60 C61 C167 C168 J6 J8 J9 JP4 R84 R91 R134 R135 R136 R137 R138 R139 R153 R154 R155 R156 R157 R158 R159 R160 R161 R162 R163 R321 R331 R332 U11 U12 U15 U16
component class 14_I2C_Sensor_OnBoard: C54 C55 C56 C57 C141 R140 R141 R142 R143 R144 R145 R146 R147 R148 R149 R150 R151 R152 U13 U14 U31
component class 13_FLOW_Sensor: C50 C51 J4 J5 R126 R127 R128 R129 R130 R131 R132 R133 U9 U10
component class 10_PRAM_RTC_WDT: C46 C47 C48 C49 C166 J3 JP3 R114 R115 R116 R117 R118 R119 R120 R121 R122 R123 R124 R125 R327 R328 U6 U7 U8 U28
component class 11_CONSOLE: C18 J1 R23 R24 R25 R26 SS
component class 08_MCU: C23 C24 C25 C26 C27 C28 C29 C30 C31 C32 C33 C34 C35 C36 C37 C38 C39 C40 C41 C42 C43 C44 C45 D3 J2 R14 R22 R27 R28 R29 R30 R31 R32 R33 R34 R35 R36 R37 R38 R39 R40 R42 R44 R46 R47 R48 R49 R54 R55 R56 R57 R58 R59 R60 R61 R64 R66 R68 R69 R70 R71 R72 R73 R74 R75 R76 R77 R78 R79 R80 R81 R82 R83 R85 R86 R87 R88 R89 R90 R92 R93 R94 R96 R97 R98 R99 R101 R102 R103 R104 R105 R106 R107 R108 R109 R110 R111 R112 R113 R179 R303 R306 R308 R309 R310 R313 R323 R324 R325 R326 R334 R335 TP1 TP2 U5 XC1
component class 09_CAN: C13 C14 C15 R17 R18 R19 R20 U3
component class 06_POWER_MEASUREMENT: C109 C110 C111 C112 R247 R248 R249 R250 R251 R252 R253 R254 R255 U25
component class 04_POWER: C19 C20 C21 C22 C113 C114 C115 C116 C117 C118 C119 C120 C121 D12 D13 D14 D17 L3 R256 R257 R258 R279 R322 U33 VR1 VR2 VR3
component class 23_MOUNTING_HOLE: Hole1 Hole2 Hole3 Hole4
component class 22_CONNECTOR_INTERFACE: C164 C165 H1 H2 R233 R234 R235 R236 R237 R238 R239 R240 R241 R242 R243 R244 R245 R246 R277 R278 R304 R305 R307 R311 R312 R329 R330 U32
differential pair RS_485: +RS_485_P -RS_485_N
differential pair SENSE_5V_SLN_HD: +SENSE_5V_SLN_HD_P -SENSE_5V_SLN_HD_N
differential pair SENSE_5V_MOTOR: +SENSE_5V_MOTOR_P -SENSE_5V_MOTOR_N
differential pair SENSE_5V_EXP: +SENSE_5V_EXP_P -SENSE_5V_EXP_N
differential pair PC104_RS485: +PC104_RS485_P -PC104_RS485_N
differential pair CAN: +CAN_H -CAN_L
differential pair SENSE_12V_EXP: +SENSE_12V_EXP_P -SENSE_12V_EXP_N

## Components (designator, comment, footprint, x,y, rotation, side; value= is the part's Value field where it differs from the comment)
C1 "47uF/25V" CAP_C_3225X80 22.583,6.92 r180 bottom
C2 "47uF/25V" CAP_C_3225X80 22.583,10.598 r180 bottom
C3 "47uF/25V" CAP_C_3225X80 15.219,10.598 r0 bottom
C4 "1uF/20V" CAP_C_1005X60 16.64,11.273 r0 top
C5 "2.2nF/10V" CAP_C_1005X60 20.843,11.273 r180 top
C6 "2.2nF/10V" CAP_C_1005X60 20.843,8.341 r180 top
C7 "47uF/25V" CAP_C_3225X80 22.583,33.267 r180 bottom
C8 "47uF/25V" CAP_C_3225X80 22.583,36.982 r180 bottom
C9 "47uF/25V" CAP_C_3225X80 15.219,36.982 r0 bottom
C10 "1uF/20V" CAP_C_1005X60 16.64,37.501 r0 top
C11 "2.2nF/10V" CAP_C_1005X60 20.843,37.301 r180 top
C12 "2.2nF/10V" CAP_C_1005X60 20.843,34.317 r180 top
C13 "0.1uF/10V" CAP_C_1005X60 25.14,43.433 r90 bottom
C14 "0.1uF/10V" CAP_C_1005X60 24.1,43.433 r90 bottom
C15 "0.1uF/10V" CAP_C_1005X60 14.033,40.633 r0 bottom
C16 "0.1uF/25V" CAP_C_1608X80 25.14,48.298 r270 bottom
C17 "0.1uF/10V" CAP_C_1005X60 14.501,47.041 r90 bottom
C18 "0.1uF/10V" CAP_C_1005X60 9.34,81.105 r90 bottom
C19 "0.01uF/16V" CAP_C_1608X80 75.849,10.567 r180 top
C20 "47uF/25V" CAP_C_3225X80 81.699,7.898 r90 top
C21 "1uF/20V" CAP_C_1005X60 72.082,10.567 r180 top
C22 "47uF/25V" CAP_C_3225X80 73.267,20.9 r0 top
C23 "0.1uF/10V" CAP_C_1005X60 66.82,38.625 r180 top
C24 "12pF/10V" CAP_C_1005X60 35.87,55.92 r270 bottom
C25 "12pF/10V" CAP_C_1005X60 28.19,56.965 r270 top
C26 "12pF/10V" CAP_C_1005X60 28.19,54.355 r90 top
C27 "10uF/20V" CAP_C_2012X110 53.34,31.464 r90 bottom
C28 "10uF/20V" CAP_C_2012X110 52.472,51.2 r0 bottom
C29 "0.1uF/10V" CAP_C_1005X60 31.972,48.064 r180 bottom
C30 "0.1uF/10V" CAP_C_1005X60 31.972,46.064 r180 bottom
C31 "0.1uF/10V" CAP_C_1005X60 31.957,35.414 r180 bottom
C32 "0.1uF/10V" CAP_C_1005X60 36.822,30.764 r270 bottom
C33 "0.1uF/10V" CAP_C_1005X60 51.322,30.764 r270 bottom
C34 "0.1uF/10V" CAP_C_1005X60 53.172,35.914 r0 bottom
C35 "0.1uF/10V" CAP_C_1005X60 53.172,44.064 r0 bottom
C36 "0.1uF/10V" CAP_C_1005X60 38.822,51.864 r90 bottom
C37 "0.1uF/10V" CAP_C_1005X60 34.322,51.864 r90 bottom
C38 "0.1uF/10V" CAP_C_1005X60 31.972,49.064 r0 bottom
C39 "0.1uF/10V" CAP_C_1005X60 31.972,36.414 r0 bottom
C40 "0.1uF/10V" CAP_C_1005X60 31.972,34.064 r0 bottom
C41 "0.1uF/10V" CAP_C_1005X60 40.322,30.764 r90 bottom
C42 "0.1uF/10V" CAP_C_1005X60 53.172,36.914 r180 bottom
C43 "0.1uF/10V" CAP_C_1005X60 53.172,49.564 r180 bottom
C44 "0.1uF/10V" CAP_C_1005X60 44.322,51.864 r270 bottom
C45 "0.1uF/10V" CAP_C_1005X60 36.322,51.864 r270 bottom
C46 "0.1uF/10V" CAP_C_1005X60 71.143,59.7 r180 bottom
C47 "0.1uF/10V" CAP_C_1005X60 12.1,81.63 r0 top
C48 "0.1uF/10V" CAP_C_1005X60 59.86,62.97 r90 top
C49 "0.1uF/10V" CAP_C_1005X60 34.553,26.004 r0 bottom
C50 "0.1uF/10V" CAP_C_1005X60 60.475,81.034 r0 top
C51 "0.1uF/10V" CAP_C_1005X60 60.475,81.034 r180 bottom
C52 "0.1uF/10V" CAP_C_1005X60 43.175,63 r0 top
C53 "0.1uF/10V" CAP_C_1005X60 43.175,61.66 r0 top
C54 "0.1uF/10V" CAP_C_1005X60 66.809,51.66 r90 top
C55 "0.1uF/10V" CAP_C_1005X60 66.259,49.8 r180 top
C56 "0.1uF/10V" CAP_C_1005X60 44.369,44.864 r270 bottom
C57 "0.1uF/10V" CAP_C_1005X60 44.369,46.914 r90 bottom
C58 "0.1uF/10V" CAP_C_1005X60 53.7,73 r0 top
C59 "0.1uF/10V" CAP_C_1005X60 53.734,61.66 r180 top
C60 "0.1uF/10V" CAP_C_1005X60 52.875,85.7 r270 top
C61 "0.1uF/10V" CAP_C_1005X60 51.757,77.4 r90 top
C62 "4.7uF/10V" CAP_C_1005X60 66.604,69.473 r90 bottom
C63 "0.1uF/10V" CAP_C_1005X60 58.885,69.163 r0 bottom
C64 "0.1uF/10V" CAP_C_1005X60 58.885,70.88 r0 bottom
C65 "1uF/20V" CAP_C_1005X60 66.304,66.309 r270 top
C66 "22nF/10V" CAP_C_1005X60 65.162,66.309 r90 top
C67 "2.2uF/10V" CAP_C_1005X60 62.879,66.309 r90 top
C68 "10uF/20V" CAP_C_2012X110 42.218,5.628 r270 bottom
C69 "0.1uF/25V" CAP_C_1608X80 43.19,18.19 r270 bottom
C70 "0.1uF/25V" CAP_C_1608X80 41.28,18.19 r270 bottom
C71 "0.1uF/25V" CAP_C_1608X80 44.468,5.928 r90 bottom
C72 "0.1uF/25V" CAP_C_1608X80 47.742,10.111 r180 bottom
C73 "10uF/20V" CAP_C_2012X110 68.29,5.628 r270 bottom
C74 "0.1uF/25V" CAP_C_1608X80 69.262,18.19 r270 bottom
C75 "0.1uF/25V" CAP_C_1608X80 67.352,18.19 r270 bottom
C76 "0.1uF/25V" CAP_C_1608X80 70.54,5.928 r90 bottom
C77 "0.1uF/25V" CAP_C_1608X80 73.814,10.612 r180 bottom
C78 "10uF/20V" CAP_C_2012X110 72.695,26.5 r180 top
C79 "10uF/20V" CAP_C_2012X110 76.3,26.5 r0 top
C80 "0.1uF/25V" CAP_C_1608X80 76.6,28.353 r180 top
C81 "0.1uF/25V" CAP_C_1608X80 72.392,28.353 r0 top
C82 "0.1uF/25V" CAP_C_1608X80 73.894,42.3 r270 top
C83 "0.1uF/25V" CAP_C_1608X80 76.151,42.3 r270 top
C84 "0.1uF/25V" CAP_C_1608X80 81.4,40.786 r0 bottom
C85 "0.1uF/25V" CAP_C_1608X80 81.4,42.77 r0 bottom
C86 "0.1uF/25V" CAP_C_1608X80 81.4,44.754 r0 bottom
C87 "0.1uF/25V" CAP_C_1608X80 81.4,46.738 r0 bottom
C88 "0.1uF/25V" CAP_C_1608X80 81.4,48.721 r0 bottom
C89 "0.1uF/25V" CAP_C_1608X80 81.4,48.721 r0 top
C90 "0.1uF/25V" CAP_C_1608X80 81.4,46.738 r0 top
C91 "0.1uF/25V" CAP_C_1608X80 81.4,44.754 r0 top
C92 "0.1uF/25V" CAP_C_1608X80 81.4,42.77 r0 top
C93 "0.1uF/25V" CAP_C_1608X80 81.4,40.786 r0 top
C109 "4.7uF/10V" CAP_C_1005X60 26.733,21.648 r270 top
C110 "4.7uF/10V" CAP_C_1005X60 31.215,23.95 r0 top
C111 "0.1uF/10V" CAP_C_1005X60 27.966,21.648 r270 top
C112 "0.1uF/10V" CAP_C_1005X60 31.215,25.178 r0 top
C113 "10uF/20V" CAP_C_2012X110 49.516,12.787 r90 top
C114 "47uF/25V" CAP_C_3225X80 53.636,17.453 r90 top
C115 "47uF/25V" CAP_C_3225X80 50.191,17.453 r90 top
C116 "10uF/20V" CAP_C_2012X110 35.042,12.787 r90 top
C117 "47uF/25V" CAP_C_3225X80 39.162,17.453 r90 top
C118 "47uF/25V" CAP_C_3225X80 35.717,17.453 r90 top
C119 "10uF/20V" CAP_C_2012X110 63.977,12.787 r90 top
C120 "47uF/25V" CAP_C_3225X80 68.097,17.453 r90 top
C121 "47uF/25V" CAP_C_3225X80 64.652,17.453 r90 top
C122 "47uF/25V" CAP_C_3225X80 22.583,24.485 r180 bottom
C123 "47uF/25V" CAP_C_3225X80 22.583,28.187 r180 bottom
C124 "47uF/25V" CAP_C_3225X80 15.219,28.187 r0 bottom
C125 "1uF/20V" CAP_C_1005X60 16.64,29.051 r0 top
C126 "2.2nF/10V" CAP_C_1005X60 20.843,29.051 r180 top
C127 "2.2nF/10V" CAP_C_1005X60 20.843,25.821 r180 top
C128 "47uF/25V" CAP_C_3225X80 22.583,15.702 r180 bottom
C129 "47uF/25V" CAP_C_3225X80 22.583,19.393 r180 bottom
C130 "47uF/25V" CAP_C_3225X80 15.219,19.393 r0 bottom
C131 "1uF/20V" CAP_C_1005X60 16.64,20.272 r0 top
C132 "2.2nF/10V" CAP_C_1005X60 20.843,20.272 r180 top
C133 "2.2nF/10V" CAP_C_1005X60 20.843,17.042 r180 top
C134 "0.1uF/10V" CAP_C_1005X60 18.66,52.17 r180 top
C136 "10uF/20V" CAP_C_2012X110 75.108,66.347 r0 bottom
C137 "0.1uF/10V" CAP_C_1005X60 78.158,66.817 r0 bottom
C138 "10uF/20V" CAP_C_2012X110 75.186,70.364 r0 top
C139 "0.1uF/10V" CAP_C_1005X60 78.354,69.889 r0 top
C141 "0.1uF/10V" CAP_C_1005X60 17.33,47.962 r270 top
C142 "0.1uF/10V" CAP_C_1005X60 14.501,51.58 r270 bottom
C143 "0.1uF/10V" CAP_C_1005X60 14.501,53.85 r270 bottom
C144 "0.1uF/10V" CAP_C_1005X60 14.501,49.311 r270 bottom
C164 "0.1uF/10V" CAP_C_1005X60 52.334,62.793 r0 top
C165 "0.1uF/10V" CAP_C_1005X60 56.048,62.793 r0 top
C166 "0.1uF/10V" CAP_C_1005X60 43.1,39.656 r270 bottom
C167 "0.1uF/10V" CAP_C_1005X60 46.894,85.7 r270 top
C168 "0.1uF/10V" CAP_C_1005X60 47.283,77.4 r90 top
C169 "1uF/20V" CAP_C_1005X60 78.2,42.871 r0 bottom
C170 "1uF/20V" CAP_C_1005X60 71.143,50.453 r0 top
C171 "0.1uF/10V" CAP_C_1005X60 81.035,52.796 r180 top
C172 "0.1uF/10V" CAP_C_1005X60 81.035,51.801 r180 top
C173 "0.1uF/10V" CAP_C_1005X60 71.143,53.521 r0 top
C174 "0.1uF/10V" CAP_C_1005X60 71.143,52.498 r0 top
C175 "1uF/20V" CAP_C_1005X60 71.143,57.397 r0 top
C176 "0.1uF/10V" CAP_C_1005X60 81.035,59.741 r180 top
C177 "0.1uF/10V" CAP_C_1005X60 81.035,58.745 r180 top
C178 "0.1uF/10V" CAP_C_1005X60 71.143,60.466 r0 top
C179 "0.1uF/10V" CAP_C_1005X60 71.143,59.443 r0 top
C406 "4.7uF/10V" CAP_C_1005X60 73.668,74.446 r270 bottom
C407 "0.1uF/10V" CAP_C_1005X60 75.4,74.446 r270 bottom
C408 "0.1uF/10V" CAP_C_1005X60 75.4,78.1 r90 bottom
C409 "1uF/20V" CAP_C_1005X60 79.935,79.25 r0 top
C410 "22nF/10V" CAP_C_1005X60 79.935,78.108 r180 top
C411 "2.2uF/10V" CAP_C_1005X60 79.935,75.825 r180 top
D1 "SS54" DO-214AC_SMA 16.419,6.883 r180 bottom
D2 "SS54" DO-214AC_SMA 16.419,33.267 r180 bottom
D3 "_LED_YELLOW" LED_0603 67.22,46.14 r180 top
D4 "SS54" DO-214AC_SMA 35.6,5.951 r180 bottom
D5 "1N5819HW-7-F" SOD3717X145N 46.692,18.492 r180 bottom
D6 "SS54" DO-214AC_SMA 61.672,5.952 r180 bottom
D7 "1N5819HW-7-F" SOD3717X145N 72.764,18.492 r180 bottom
D8 "SS54" DO-214AC_SMA 16.419,24.472 r180 bottom
D9 "SS54" DO-214AC_SMA 16.419,15.678 r180 bottom
D10 "_LED_YELLOW" LED_0603 26.567,6.2 r270 top
D11 "_LED_YELLOW" LED_0603 32.52,6.2 r270 top
D12 "_LED_YELLOW" LED_0603 38.473,6.2 r270 top
D13 "_LED_YELLOW" LED_0603 34.505,6.2 r270 top
D14 "_LED_YELLOW" LED_0603 36.489,6.2 r270 top
D15 "_LED_YELLOW" LED_0603 30.536,6.2 r270 top
D16 "_LED_YELLOW" LED_0603 28.552,6.2 r270 top
D17 "SS54" DO-214AC_SMA 81.8,15.567 r90 top
D18 "1N4007FL" SOD3717X145N 76.75,57.641 r180 bottom value=1N5007
D19 "1N4007FL" SOD3717X145N 76.75,49.807 r180 bottom value=1N5007
D20 "1N4007FL" SOD3717X145N 76.75,45.891 r180 bottom value=1N5007
D21 "1N4007FL" SOD3717X145N 76.75,53.724 r180 bottom value=1N5007
H1 "ESQ-126-14-G-D" SAMTEC_ESQ-126-14-G-D 11.19,13.88 r90 top locked
H2 "ESQ-126-14-G-D" SAMTEC_ESQ-126-14-G-D 6.11,13.88 r90 top locked
Hole1 "hole_space" HEX-M3_NoVia 3.57,8.8 r0 top locked
Hole2 "hole_space" HEX-M3_NoVia 3.57,82.46 r0 top locked
Hole3 "hole_space" HEX-M3_NoVia 89.3,85 r0 top locked
Hole4 "hole_space" HEX-M3_NoVia 89.3,5 r0 top locked
J1 "0533980471" MOLEX_0533980471 11.999,85.56 r180 bottom
J2 "Header 8x1" Header_254P_8x1 64.05,38.66 r270 top
J3 "0532610271" molex_0532610271 12.1,85.721 r180 top
J4 "0532610671" MOLEX_0532610671 60.525,84.3 r180 top
J5 "0532610671" MOLEX_0532610671 60.525,84.3 r0 bottom
J6 "5040500491" MOLEX_5040500491 41.75,84.5 r180 bottom
J7 "5040500891" MOLEX_5040500891 76.3,84.5 r180 bottom
J8 "5040500891" MOLEX_5040500891 26.65,84.5 r180 bottom
J9 "5040500891" MOLEX_5040500891 26.65,84.5 r0 top
J10 "5040500891" MOLEX_5040500891 76.3,84.5 r0 top locked
J11 "0532610271" MOLEX_0532610271 88.362,15.7 r90 top locked
J12 "0532610271" MOLEX_0532610271 88.362,15.7 r270 bottom
J13 "5040500591" MOLEX_5040500591 87.1,44.752 r90 bottom locked
J14 "5040500591" MOLEX_5040500591 87.1,44.752 r270 top
J15 "0532610471" MOLEX_0532610471 88.1,74.297 r270 bottom locked
J16 "5040500891" MOLEX_5040500891 87,29.25 r90 bottom locked
J17 "0532610471" MOLEX_0532610471 88.1,74.297 r90 top
J18 "5040500891" MOLEX_5040500891 87,59.8 r90 bottom
J19 "5040500891" MOLEX_5040500891 87,59.8 r270 top
J20 "5040500891" MOLEX_5040500891 87,29.298 r270 top locked
JP1 "JUMPER" JUMPER_1608 18.991,10.653 r90 bottom
JP2 "JUMPER" JUMPER_1608 18.991,37.036 r90 bottom
JP3 "JUMPER" JUMPER_1608 31.228,29.413 r90 bottom
JP4 "JUMPER" JUMPER_1608 52.762,69.9 r0 top
JP5 "DNP/0R" JUMPER_1-2_1608X60 74.528,24.4 r180 top
JP10 "JUMPER" JUMPER_1608 18.991,28.242 r90 bottom
JP11 "JUMPER" JUMPER_1608 18.991,19.447 r90 bottom
L1 "47uH" IND_MP_1250x1250x850 32.68,14.8 r90 bottom
L2 "47uH" IND_MP_1250x1250x850 58.752,14.8 r90 bottom
L3 "SRP7050TA-220M" PSM6050 75.29,15.362 r90 top
Q1 "AO3400A" SOT95P240X120-3N 72.326,57.091 r0 bottom
Q2 "AO3400A" SOT95P240X120-3N 72.326,49.257 r0 bottom
Q3 "AO3400A" SOT95P240X120-3N 72.326,45.341 r0 bottom
Q4 "AO3400A" SOT95P240X120-3N 72.326,53.174 r0 bottom
R1 "DNP/10k" RES_C_1005X40 14.305,11.273 r0 top
R2 "470k" RES_C_1005X40 14.305,8.258 r180 top
R3 "47k" RES_C_1005X40 14.305,5.465 r0 top
R4 "47k" RES_C_1005X40 14.305,6.643 r0 top
R5 "1k" RES_C_1005X40 26.535,9.02 r270 top
R6 "10k" RES_C_1005X40 14.305,10.268 r180 top
R7 "47k" RES_C_1005X40 14.305,9.263 r0 top
R8 "1.6k" RES_C_1005X40 20.843,10.268 r180 top
R9 "10k" RES_C_1005X40 14.305,35.317 r180 top
R10 "470k" RES_C_1005X40 14.305,36.317 r180 top
R11 "47k" RES_C_1005X40 14.305,31.196 r0 top
R12 "47k" RES_C_1005X40 14.305,32.471 r0 top
R13 "1k" RES_C_1005X40 32.483,9.02 r270 top
R14 "10k" RES_C_1005X40 58.308,39.301 r180 top
R15 "47k" RES_C_1005X40 14.305,34.317 r0 top
R16 "1.6k" RES_C_1005X40 20.843,36.317 r180 top
R17 "60R" RES_C_1005X40 14.033,44.008 r0 bottom
R18 "22R" RES_C_1005X40 14.033,41.758 r0 bottom
R19 "60R" RES_C_1005X40 14.033,42.883 r180 bottom
R20 "10k" RES_C_1005X40 14.033,45.133 r0 bottom
R22 "22R" RES_C_1005X40 58.308,49.962 r180 top
R23 "10k" RES_C_1005X40 10.433,81.105 r90 bottom
R24 "10k" RES_C_1005X40 13.71,81.105 r90 bottom
R25 "22R" RES_C_1005X40 11.525,81.105 r270 bottom
R26 "22R" RES_C_1005X40 12.618,81.105 r270 bottom
R27 "22R" RES_C_1005X40 58.308,50.932 r0 top
R28 "22R" RES_C_1005X40 28.795,50.905 r0 top
R29 "22R" RES_C_1005X40 58.308,48.024 r0 top
R30 "22R" RES_C_1005X40 44.957,55.92 r90 top
R31 "22R" RES_C_1005X40 58.308,45.116 r180 top
R32 "22R" RES_C_1005X40 40.123,55.92 r270 top
R33 "22R" RES_C_1005X40 58.308,43.178 r0 top
R34 "22R" RES_C_1005X40 42.057,55.92 r270 top
R35 "3.24k" RES_C_1005X40 66.82,44.69 r180 top
R36 "22R" RES_C_1005X40 58.308,32.017 r0 top
R37 "22R" RES_C_1005X40 43.99,55.92 r270 top
R38 "22R" RES_C_1005X40 58.308,47.055 r180 top
R39 "22R" RES_C_1005X40 58.308,40.27 r180 top
R40 "22R" RES_C_1005X40 58.308,37.39 r180 top
R42 "22R" RES_C_1005X40 42.506,26.99 r270 top
R44 "22R" RES_C_1005X40 44.472,26.99 r270 top
R46 "22R" RES_C_1005X40 58.308,30.078 r0 top
R47 "22R" RES_C_1005X40 38.572,26.99 r270 top
R48 "22R" RES_C_1005X40 50.373,26.99 r270 top
R49 "22R" RES_C_1005X40 58.308,34.9 r0 top
R50 "10k" RES_C_1005X40 81.609,33 r180 bottom
R51 "10k" RES_C_1005X40 81.609,31.5 r180 bottom
R52 "10k" RES_C_1005X40 81.609,27 r180 bottom
R53 "10k" RES_C_1005X40 81.609,25.598 r180 bottom
R54 "22R" RES_C_1005X40 58.308,53.839 r180 top
R55 "22R" RES_C_1005X40 58.308,32.986 r180 top
R56 "22R" RES_C_1005X40 58.308,29.109 r180 top
R57 "22R" RES_C_1005X40 53.324,26.99 r90 top
R58 "22R" RES_C_1005X40 28.795,37.714 r180 top
R59 "22R" RES_C_1005X40 51.357,26.99 r270 top
R60 "22R" RES_C_1005X40 28.795,38.729 r180 top
R61 "22R" RES_C_1005X40 28.795,34.67 r180 top
R62 "10k" RES_C_1005X40 81.609,25.598 r180 top
R63 "10k" RES_C_1005X40 81.609,27 r180 top
R64 "22R" RES_C_1005X40 43.489,26.99 r90 top
R65 "10k" RES_C_1005X40 81.609,31.5 r180 top
R66 "22R" RES_C_1005X40 41.522,26.99 r90 top
R67 "10k" RES_C_1005X40 81.609,33 r180 top
R68 "22R" RES_C_1005X40 39.555,26.99 r90 top
R69 "22R" RES_C_1005X40 46.439,26.99 r270 top
R70 "22R" RES_C_1005X40 40.539,26.99 r90 top
R71 "22R" RES_C_1005X40 54.307,26.99 r270 top
R72 "22R" RES_C_1005X40 37.588,26.99 r90 top
R73 "22R" RES_C_1005X40 49.791,55.92 r90 top
R74 "22R" RES_C_1005X40 55.291,26.99 r90 top
R75 "22R" RES_C_1005X40 28.795,49.891 r0 top
R76 "22R" RES_C_1005X40 28.795,35.685 r0 top
R77 "22R" RES_C_1005X40 43.023,55.92 r90 top
R78 "10k" RES_C_1005X40 66.82,40.23 r0 top
R79 "22R" RES_C_1005X40 48.406,26.99 r270 top
R80 "22R" RES_C_1005X40 66.82,37.02 r0 top
R81 "0R" RES_C_1005X40 58.308,36.394 r0 top
R82 "22R" RES_C_1005X40 28.76,31.44 r180 top
R83 "22R" RES_C_1005X40 28.795,48.876 r0 top
R84 "DNP/4.7k" RES_C_1005X40 40.735,63 r180 top
R85 "22R" RES_C_1005X40 28.795,47.861 r0 top
R86 "22R" RES_C_1005X40 34.948,26.99 r270 top
R87 "22R" RES_C_1005X40 35.928,26.99 r270 top
R88 "22R" RES_C_1005X40 58.308,38.332 r0 top
R89 "22R" RES_C_1005X40 39.156,55.92 r270 top
R90 "22R" RES_C_1005X40 58.308,42.209 r0 top
R91 "DNP/4.7k" RES_C_1005X40 38.684,63 r0 top
R92 "22R" RES_C_1005X40 58.308,52.87 r180 top
R93 "22R" RES_C_1005X40 28.795,40.759 r180 top
R94 "DNP/22R" RES_C_1005X40 52.691,55.92 r270 top
R96 "22R" RES_C_1005X40 58.308,33.955 r180 top
R97 "22R" RES_C_1005X40 51.724,55.92 r270 top
R98 "22R" RES_C_1005X40 58.308,46.086 r0 top
R99 "22R" RES_C_1005X40 58.308,41.24 r180 top
R101 "22R" RES_C_1005X40 58.308,48.993 r0 top
R102 "22R" RES_C_1005X40 58.308,51.901 r0 top
R103 "22R" RES_C_1005X40 50.757,55.92 r90 top
R104 "22R" RES_C_1005X40 28.795,51.92 r0 top
R105 "22R" RES_C_1005X40 47.857,55.92 r90 top
R106 "22R" RES_C_1005X40 45.924,55.92 r90 top
R107 "22R" RES_C_1005X40 41.09,55.92 r90 top
R108 "4.7k" RES_C_1005X40 26.671,45.458 r270 top
R109 "22R" RES_C_1005X40 49.39,26.99 r90 top
R110 "22R" RES_C_1005X40 28.795,44.817 r180 top
R111 "22R" RES_C_1005X40 28.795,45.832 r180 top
R112 "1M" RES_C_1005X40 33.68,55.92 r90 top
R113 "5.62k" RES_C_1005X40 35.87,55.92 r270 top
R114 "4.7k" RES_C_1005X40 59.86,58.08 r90 top
R115 "4.7k" RES_C_1005X40 59.86,60.525 r90 top
R116 "4.7k" RES_C_1005X40 67.1,59.7 r90 top
R117 "4.7k" RES_C_1005X40 71.143,61.042 r180 bottom
R118 "4.7k" RES_C_1005X40 78.158,63.303 r0 bottom
R119 "4.7k" RES_C_1005X40 71.143,62.384 r180 bottom
R120 "4.7k" RES_C_1005X40 71.143,63.727 r180 bottom
R121 "4.7k" RES_C_1005X40 78.158,60.053 r180 bottom
R122 "10k" RES_C_1005X40 34.881,32.319 r90 bottom
R123 "22R" RES_C_1005X40 35.8,32.319 r270 bottom
R124 "16.5k/1%" RES_C_1005X40 31.228,32.319 r270 bottom
R125 "16.5k/1%" RES_C_1005X40 31.228,26.713 r90 bottom
R126 "4.7k" RES_C_1005X40 55.898,78.75 r0 top
R127 "4.7k" RES_C_1005X40 55.898,80.025 r0 top
R128 "4.7k" RES_C_1005X40 65,78.75 r180 top
R129 "4.7k" RES_C_1005X40 65,80.025 r180 top
R130 "10k" RES_C_1005X40 65,77.475 r0 top
R131 "4.7k" RES_C_1005X40 55.9,78.75 r0 bottom
R132 "4.7k" RES_C_1005X40 55.9,80.025 r0 bottom
R133 "10k" RES_C_1005X40 55.9,77.475 r180 bottom
R134 "DNP/4.7k" RES_C_1005X40 40.735,61.66 r180 top
R135 "DNP/4.7k" RES_C_1005X40 38.684,61.66 r0 top
R136 "4.7k" RES_C_1005X40 45.698,85.7 r90 top
R137 "4.7k" RES_C_1005X40 42.109,85.7 r90 top
R138 "4.7k" RES_C_1005X40 46.164,77.4 r90 top
R139 "4.7k" RES_C_1005X40 45.046,77.4 r90 top
R140 "4.7k" RES_C_1005X40 61.555,51.66 r90 top
R141 "DNP/4.7k" RES_C_1005X40 66.809,53.88 r90 top
R142 "22R" RES_C_1005X40 61.555,53.88 r90 top
R143 "22R" RES_C_1005X40 63.2,54.43 r0 top
R144 "0R" RES_C_1005X40 65.29,54.43 r180 top
R145 "4.7k" RES_C_1005X40 47.019,42.064 r180 bottom
R146 "4.7k" RES_C_1005X40 44.919,42.064 r0 bottom
R147 "4.7k" RES_C_1005X40 49.119,47.464 r180 bottom
R148 "4.7k" RES_C_1005X40 49.119,42.064 r180 bottom
R149 "4.7k" RES_C_1005X40 45.919,47.464 r0 bottom
R150 "22R" RES_C_1005X40 49.119,46.164 r180 bottom
R151 "22R" RES_C_1005X40 49.119,44.864 r180 bottom
R152 "DNP/4.7k" RES_C_1005X40 49.119,43.564 r0 bottom
R153 "DNP/4.7k" RES_C_1005X40 51.59,61.66 r180 top
R154 "0R" RES_C_1005X40 49.527,61.66 r0 top
R155 "DNP/4.7k" RES_C_1005X40 47.463,61.66 r180 top
R156 "0R" RES_C_1005X40 45.4,61.66 r0 top
R157 "4.7k" RES_C_1005X40 51.679,85.7 r90 top
R158 "4.7k" RES_C_1005X40 48.09,85.7 r90 top
R159 "4.7k" RES_C_1005X40 50.638,77.4 r90 top
R160 "4.7k" RES_C_1005X40 49.52,77.4 r90 top
R161 "22R" RES_C_1005X40 50.483,85.7 r270 top
R162 "22R" RES_C_1005X40 49.286,85.7 r270 top
R163 "10k" RES_C_1005X40 48.401,77.4 r270 top
R164 "10k" RES_C_1005X40 66.304,75.1 r270 top
R165 "10k" RES_C_1005X40 59.77,75.1 r90 top
R166 "22R" RES_C_1005X40 60.77,75.1 r270 top
R167 "22R" RES_C_1005X40 64.404,75.1 r270 top
R168 "22R" RES_C_1005X40 62.704,75.1 r270 top
R169 "22R" RES_C_1005X40 61.737,75.1 r270 top
R170 "10k" RES_C_1005X40 64.02,66.309 r90 top
R171 "22R" RES_C_1005X40 65.354,75.1 r270 top
R172 "20k" RES_C_1005X40 61.237,66.309 r90 top
R173 "0.05R/1W" RES_C_3216X70 47.942,6.51 r90 bottom
R174 "1k" RES_C_1608X60 47.742,12.511 r0 bottom
R175 "10k" RES_C_1608X60 47.742,14.897 r180 bottom
R176 "0.05R/1W" RES_C_3216X70 74.014,6.51 r90 bottom
R177 "1k" RES_C_1608X60 73.814,12.511 r0 bottom
R178 "10k" RES_C_1608X60 73.814,14.898 r180 bottom
R179 "22R" RES_C_1005X40 38.19,55.92 r90 top
R180 "10k" RES_C_1005X40 70.851,40.9 r90 top
R233 "0R" RES_C_1005X40 14.305,39.186 r180 top
R234 "0R" RES_C_1005X40 14.305,41.45 r180 top
R235 "0R" RES_C_1005X40 14.305,44.933 r180 top
R236 "0R" RES_C_1005X40 14.305,47.806 r180 top
R237 "DNP/4.7k" RES_C_1005X40 14.305,64.617 r180 top
R238 "DNP/4.7k" RES_C_1005X40 14.305,69.069 r180 top
R239 "0R" RES_C_1005X40 14.305,58.68 r180 top
R240 "0R" RES_C_1005X40 14.305,60.164 r0 top
R241 "0R" RES_C_1005X40 14.305,61.648 r180 top
R242 "0R" RES_C_1005X40 14.305,63.133 r180 top
R243 "0R" RES_C_1005X40 14.305,67.585 r180 top
R244 "0R" RES_C_1005X40 14.305,66.101 r0 top
R245 "0R" RES_C_1005X40 14.305,72.038 r180 top
R246 "0R" RES_C_1005X40 14.305,70.554 r0 top
R247 "DNP/4.7k" RES_C_1005X40 31.215,26.406 r180 top
R248 "DNP/4.7k" RES_C_1005X40 31.215,27.633 r180 top
R249 "10k" RES_C_1005X40 29.199,21.648 r90 top
R250 "10k" RES_C_1005X40 30.433,21.648 r90 top
R251 "10k" RES_C_1005X40 28.708,28.638 r0 top
R252 "KRL1632E-M-R010-F-T5" RES_C_1206_SHUNT 19.643,6.09 r0 top value=0.01R
R253 "KRL1632E-M-R010-F-T5" RES_C_1206_SHUNT 19.643,31.846 r0 top value=0.01R
R254 "KRL1632E-M-R010-F-T5" RES_C_1206_SHUNT 19.643,23.638 r0 top value=0.01R
R255 "KRL1632E-M-R010-F-T5" RES_C_1206_SHUNT 19.643,14.859 r0 top value=0.01R
R256 "1k" RES_C_1005X40 38.431,9.02 r270 top
R257 "1k" RES_C_1005X40 34.466,9.02 r270 top
R258 "1k" RES_C_1005X40 36.448,9.02 r270 top
R259 "DNP/10k" RES_C_1005X40 14.305,29.051 r0 top
R260 "470k" RES_C_1005X40 14.305,25.951 r180 top
R261 "47k" RES_C_1005X40 14.305,23.013 r0 top
R262 "47k" RES_C_1005X40 14.305,24.188 r0 top
R263 "1k" RES_C_1005X40 30.501,9.02 r270 top
R264 "10k" RES_C_1005X40 14.305,27.951 r180 top
R265 "133k" RES_C_1005X40 14.305,26.951 r0 top
R266 "1.6k" RES_C_1005X40 20.843,27.951 r180 top
R267 "DNP/10k" RES_C_1005X40 14.305,20.272 r0 top
R268 "470k" RES_C_1005X40 14.305,17.172 r180 top
R269 "47k" RES_C_1005X40 14.305,14.234 r0 top
R270 "47k" RES_C_1005X40 14.305,15.409 r0 top
R271 "1k" RES_C_1005X40 28.518,9.02 r270 top
R272 "10k" RES_C_1005X40 14.305,19.172 r180 top
R273 "133k" RES_C_1005X40 14.305,18.172 r0 top
R274 "1.6k" RES_C_1005X40 20.843,19.172 r180 top
R275 "10k" RES_C_1005X40 23.581,52.17 r180 top
R276 "120R" RES_C_1005X40 17,55.64 r90 top
R277 "10k" RES_C_1005X40 54.409,67.5 r180 top
R278 "100k" RES_C_1005X40 52.334,67.5 r180 top
R279 "10k" RES_C_1005X40 71.532,7.49 r90 top
R281 "DNP/4.7k" RES_C_1005X40 71.143,68.868 r0 bottom
R282 "DNP/4.7k" RES_C_1005X40 71.143,67.601 r0 bottom
R283 "4.7k" RES_C_1005X40 81.043,66.817 r180 bottom
R284 "4.7k" RES_C_1005X40 81.043,65.497 r180 bottom
R285 "0R" RES_C_1005X40 71.143,65.069 r0 bottom
R286 "0R" RES_C_1005X40 71.143,70.134 r0 bottom
R287 "0R" RES_C_1005X40 81.043,68.137 r180 bottom
R288 "10k" RES_C_1005X40 81.043,69.457 r0 bottom
R289 "DNP/0R" RES_C_1005X40 71.143,66.335 r0 bottom
R292 "DNP/4.7k" RES_C_1005X40 71.143,68.867 r0 top
R293 "DNP/4.7k" RES_C_1005X40 71.143,67.601 r0 top
R294 "4.7k" RES_C_1005X40 81.043,69.457 r180 top
R295 "4.7k" RES_C_1005X40 81.043,70.777 r180 top
R296 "0R" RES_C_1005X40 71.143,65.068 r0 top
R297 "0R" RES_C_1005X40 71.143,70.134 r0 top
R298 "0R" RES_C_1005X40 81.043,68.137 r180 top
R299 "10k" RES_C_1005X40 81.043,65.497 r0 top
R302 "DNP/0R" RES_C_1005X40 71.143,71.4 r0 bottom
R303 "22R" RES_C_1005X40 52.34,26.99 r270 top
R304 "0R" RES_C_1005X40 14.305,73.522 r180 top
R305 "0R" RES_C_1005X40 14.305,75.006 r180 top
R306 "22R" RES_C_1005X40 28.795,46.847 r0 top
R307 "0R" RES_C_1005X40 14.305,42.583 r0 top
R308 "22R" RES_C_1005X40 58.308,31.048 r0 top
R309 "22R" RES_C_1005X40 28.795,41.773 r180 top
R310 "22R" RES_C_1005X40 28.795,42.788 r180 top
R311 "0R" RES_C_1005X40 14.305,40.318 r180 top
R312 "0R" RES_C_1005X40 14.305,46.37 r0 top
R313 "22R" RES_C_1005X40 48.824,55.92 r90 top
R315 "DNP/0R" RES_C_1005X40 81.043,70.777 r180 bottom
R316 "DNP/0R" RES_C_1005X40 71.143,66.335 r0 top
R317 "DNP/0R" RES_C_1005X40 71.143,71.4 r0 top
R318 "DNP/0R" RES_C_1005X40 81.043,66.817 r180 top
R319 "10k" RES_C_1005X40 14.501,56.119 r270 bottom
R320 "10k" RES_C_1005X40 25.34,55.898 r270 bottom
R321 "22R" RES_C_1005X40 44.501,85.7 r270 top
R322 "3.24k" RES_C_1005X40 71.532,5.412 r90 top
R323 "22R" RES_C_1005X40 47.423,26.99 r90 top
R324 "22R" RES_C_1005X40 45.456,26.99 r270 top
R325 "22R" RES_C_1005X40 46.89,55.92 r90 top
R326 "22R" RES_C_1005X40 28.795,36.7 r0 top
R327 "4.7k" RES_C_1005X40 43.1,37.405 r270 bottom
R328 "4.7k" RES_C_1005X40 50.188,34.2 r0 bottom
R329 "4.7k" RES_C_1005X40 58.342,64.607 r0 top
R330 "4.7k" RES_C_1005X40 58.342,65.602 r0 top
R331 "22R" RES_C_1005X40 43.305,85.7 r270 top
R332 "10k" RES_C_1005X40 43.927,77.4 r270 top
R334 "22R" RES_C_1005X40 28.795,39.744 r0 top
R335 "22R" RES_C_1005X40 28.795,43.803 r180 top
R336 "120R" RES_C_1005X40 75.669,55.841 r0 bottom
R337 "120R" RES_C_1005X40 75.669,48.007 r0 bottom
R338 "10k" RES_C_1005X40 78.2,55.841 r180 bottom
R339 "10k" RES_C_1005X40 78.2,48.007 r180 bottom
R340 "120R" RES_C_1005X40 75.669,44.091 r0 bottom
R341 "120R" RES_C_1005X40 75.669,51.924 r0 bottom
R342 "10k" RES_C_1005X40 78.2,44.091 r180 bottom
R343 "10k" RES_C_1005X40 78.2,51.924 r180 bottom
R344 "22R" RES_C_1005X40 81.035,50.806 r0 top
R345 "22R" RES_C_1005X40 81.035,53.792 r180 top
R346 "10k" RES_C_1005X40 81.035,54.787 r0 top
R347 "22R" RES_C_1005X40 71.143,51.476 r180 top
R348 "22R" RES_C_1005X40 71.143,54.544 r0 top
R349 "10k" RES_C_1005X40 71.143,55.567 r0 top
R350 "22R" RES_C_1005X40 81.035,57.75 r0 top
R351 "22R" RES_C_1005X40 81.035,60.736 r180 top
R352 "10k" RES_C_1005X40 81.035,61.731 r0 top
R353 "22R" RES_C_1005X40 71.143,58.42 r180 top
R354 "22R" RES_C_1005X40 71.143,61.488 r0 top
R355 "10k" RES_C_1005X40 71.143,62.511 r0 top
R409 "10k" RES_C_1005X40 71.143,79.25 r0 top
R410 "10k" RES_C_1005X40 71.143,72.716 r180 top
R411 "22R" RES_C_1005X40 71.143,73.716 r0 top
R412 "22R" RES_C_1005X40 71.143,77.35 r0 top
R413 "22R" RES_C_1005X40 71.143,75.65 r0 top
R414 "22R" RES_C_1005X40 71.143,74.683 r0 top
R415 "10k" RES_C_1005X40 79.935,76.966 r180 top
R416 "22R" RES_C_1005X40 71.143,78.3 r0 top
R417 "20k" RES_C_1005X40 79.935,74.183 r180 top
TP1 "" Testpoint_80 56.4,38.064 r90 top
TP2 "" Testpoint_80 54.984,48.274 r90 top
U1 "TPS259470ARPWR" VQFN-HR-10 17.503,9.399 r0 top
U2 "TPS259470ARPWR" VQFN-HR-10 17.503,35.152 r0 top
U3 "SN65HVD230DR" SOIC127P600X175-8N 19.927,43.533 r180 bottom
U4 "SN65C3232PWR" SOP65P640X120-16N 20.001,49.919 r0 bottom
U5 "SAMV71Q21B" AP6-00118 42.572,41.314 r0 top locked
U6 "MB85RS2MTAPNF-G-BDERE1" SOIC127P602X173-8N 63.431,60.747 r90 top
U7 "RV-3129-C3-32.768KHZ-OPTION-A-TB-QA" IC_RV-3129-C3_32.768KHZ_OPTION_A_TB_QA 75.094,61.653 r0 bottom
U8 "TPL5010QDDCTQ1" SOT95P280X145-6N 33.853,28.861 r90 bottom
U9 "PCA9508DP,118" TSOP8 60.445,78.75 r0 top
U10 "PCA9508DP,118" TSOP8 60.445,78.75 r180 bottom
U11 "mp-HighDriver" MP_HIGHDRIVER 38.02,69.01 r180 top locked
U12 "PCA9508DP,118" TSOP8 44.73,81.6 r270 top
U13 "BME688" IC_BME688 64.4,52.1 r180 top
U14 "LSM6DSOXTR" PQFN50P250X300X86-14N 46.5,45 r90 bottom
U15 "mp-HighDriver4" MP_HIGHDRIVER4 36.75,67.72 r180 bottom locked
U16 "PCA9508DP,118" TSOP8 50.051,81.6 r270 top
U17 "MAX22200ETJ+T" 21-0140AK_T3255_8C_MXM 63.37,70.85 r270 top
U18 "AL8843SP-13" SOIC127P602X173-8N_EPAD 42.702,11.922 r270 bottom
U19 "AL8843SP-13" SOIC127P602X173-8N_EPAD 68.774,11.923 r270 bottom
U20 "IC_DRV8910QPWPRQ1" IC_DRV8910QPWPRQ1 74.451,34.4 r270 top
U25 "PAC1934 UQFN-16" UQFN-16_4X4_EP2.6X2.6 27.133,25.508 r180 top value=PAC1934
U26 "TPS259470ARPWR" VQFN-HR-10 17.503,26.954 r0 top
U27 "TPS259470ARPWR" VQFN-HR-10 17.503,18.175 r0 top
U28 "IS66WVS8M8FBLL-104NLI" SOIC8_150MIL_N_ISI 47.48,37.9 r180 bottom locked
U29 "PCA9508DP,118" TSOP8 76.283,69.597 r0 bottom
U30 "PCA9508DP,118" TSOP8 76.135,67.109 r0 top
U31 "TC1047AVNBTR" SOT95P240X120-3N 19.9,48.962 r90 top
U32 "PCA9508DP,118" TSOP8 54.173,65.107 r180 top
U33 "TPS5430DDAR" TPS54531DDAR 76.31,6.848 r0 top
U34 "MAX3485CSA+T" 21-0041-3-M_90-0096-8L_MXM 21.119,55.66 r180 top
U35 "MAX22200ETJ+T" 21-0140AK_T3255_8C_MXM 75.393,76.316 r0 top
U36 "OPA2340UA" SOIC127P602X173-8N 76.135,52.882 r180 top
U37 "OPA2340UA" SOIC127P602X173-8N 76.135,59.826 r180 top
VR1 "LM1117MP-3.3/NOPB" VREG_LM1117MP-3.3/NOPB 44.913,15.361 r90 top
VR2 "LM1117MP-3.3/NOPB" VREG_LM1117MP-3.3/NOPB 30.439,15.361 r90 top
VR3 "LM1117MP-3.3/NOPB" VREG_LM1117MP-3.3/NOPB 59.375,15.361 r90 top
XC1 "FC5BQCCMC12.0-T1" AP7-00039 30.84,55.595 r90 top value=12.00MHz

## Footprints (in the part's own frame and the unit in brackets; to place one, negate y for a bottom-side part, rotate by r counter-clockwise, add the part's x,y. Pads: shape width x height; smd on the part's side, far side on the other; paste and mask are expansions set on the pad)
21-0041-3-M_90-0096-8L_MXM [mm]
  rect 1.981x0.541 smd paste+0 mask+0: 1(-2.465,1.905) 2(-2.465,0.635) 3(-2.465,-0.635) 4(-2.465,-1.905) 5(2.465,-1.905) 6(2.465,-0.635) 7(2.465,0.635) 8(2.465,1.905)
  silkscreen extent -2.59,-2.63 2.13,2.84, body extent -3.1,-2.5 3.1,2.5, height 1.75
21-0140AK_T3255_8C_MXM [mil]
  rect 32x10 smd paste+0 mask+0: 1(-94.5,68.9) 2(-94.5,49.21) 3(-94.5,29.53) 4(-94.5,9.84) 5(-94.5,-9.84) 6(-94.5,-29.53) 7(-94.5,-49.21) 8(-94.5,-68.9) 17(94.5,-68.9) 18(94.5,-49.21) 19(94.5,-29.53) 20(94.5,-9.84) 21(94.5,9.84) 22(94.5,29.53) 23(94.5,49.21) 24(94.5,68.9)
  rect 10x32 smd paste+0 mask+0: 9(-68.9,-94.5) 10(-49.21,-94.5) 11(-29.53,-94.5) 12(-9.84,-94.5) 13(9.84,-94.5) 14(29.53,-94.5) 15(49.21,-94.5) 16(68.9,-94.5) 25(68.9,94.5) 26(49.21,94.5) 27(29.53,94.5) 28(9.84,94.5) 29(-9.84,94.5) 30(-29.53,94.5) 31(-49.21,94.5) 32(-68.9,94.5)
  rect 126x126 smd paste-5.91 mask+0: 33(0,0)
  silkscreen extent -104,-99 99,104, body extent -99,-99 99,99, height 32
AP6-00118 [mm]
  oval 1.7x0.3 smd: 1(-10.6,8.75) 2(-10.6,8.25) 3(-10.6,7.75) 4(-10.6,7.25) 5(-10.6,6.75) 6(-10.6,6.25) 7(-10.6,5.75) 8(-10.6,5.25) 9(-10.6,4.75) 10(-10.6,4.25) 11(-10.6,3.75) 12(-10.6,3.25) 13(-10.6,2.75) 14(-10.6,2.25) 15(-10.6,1.75) 16(-10.6,1.25) 17(-10.6,0.75) 18(-10.6,0.25) 19(-10.6,-0.25) 20(-10.6,-0.75) 21(-10.6,-1.25) 22(-10.6,-1.75) 23(-10.6,-2.25) 24(-10.6,-2.75) 25(-10.6,-3.25) 26(-10.6,-3.75) 27(-10.6,-4.25) 28(-10.6,-4.75) 29(-10.6,-5.25) 30(-10.6,-5.75) 31(-10.6,-6.25) 32(-10.6,-6.75) 33(-10.6,-7.25) 34(-10.6,-7.75) 35(-10.6,-8.25) 36(-10.6,-8.75) 73(10.6,-8.75) 74(10.6,-8.25) 75(10.6,-7.75) 76(10.6,-7.25) 77(10.6,-6.75) 78(10.6,-6.25) 79(10.6,-5.75) 80(10.6,-5.25) 81(10.6,-4.75) 82(10.6,-4.25) 83(10.6,-3.75) 84(10.6,-3.25) 85(10.6,-2.75) 86(10.6,-2.25) 87(10.6,-1.75) 88(10.6,-1.25) 89(10.6,-0.75) 90(10.6,-0.25) 91(10.6,0.25) 92(10.6,0.75) 93(10.6,1.25) 94(10.6,1.75) 95(10.6,2.25) 96(10.6,2.75) 97(10.6,3.25) 98(10.6,3.75) 99(10.6,4.25) 100(10.6,4.75) 101(10.6,5.25) 102(10.6,5.75) 103(10.6,6.25) 104(10.6,6.75) 105(10.6,7.25) 106(10.6,7.75) 107(10.6,8.25) 108(10.6,8.75)
  oval 0.3x1.7 smd: 37(-8.75,-10.55) 38(-8.25,-10.55) 39(-7.75,-10.55) 40(-7.25,-10.55) 41(-6.75,-10.55) 42(-6.25,-10.55) 43(-5.75,-10.55) 44(-5.25,-10.55) 45(-4.75,-10.55) 46(-4.25,-10.55) 47(-3.75,-10.55) 48(-3.25,-10.55) 49(-2.75,-10.55) 50(-2.25,-10.55) 51(-1.75,-10.55) 52(-1.25,-10.55) 53(-0.75,-10.55) 54(-0.25,-10.55) 55(0.25,-10.55) 56(0.75,-10.55) 57(1.25,-10.55) 58(1.75,-10.55) 59(2.25,-10.55) 60(2.75,-10.55) 61(3.25,-10.55) 62(3.75,-10.55) 63(4.25,-10.55) 64(4.75,-10.55) 65(5.25,-10.55) 66(5.75,-10.55) 67(6.25,-10.55) 68(6.75,-10.55) 69(7.25,-10.55) 70(7.75,-10.55) 71(8.25,-10.55) 72(8.75,-10.55) 109(8.75,10.55) 110(8.25,10.55) 111(7.75,10.55) 112(7.25,10.55) 113(6.75,10.55) 114(6.25,10.55) 115(5.75,10.55) 116(5.25,10.55) 117(4.75,10.55) 118(4.25,10.55) 119(3.75,10.55) 120(3.25,10.55) 121(2.75,10.55) 122(2.25,10.55) 123(1.75,10.55) 124(1.25,10.55) 125(0.75,10.55) 126(0.25,10.55) 127(-0.25,10.55) 128(-0.75,10.55) 129(-1.25,10.55) 130(-1.75,10.55) 131(-2.25,10.55) 132(-2.75,10.55) 133(-3.25,10.55) 134(-3.75,10.55) 135(-4.25,10.55) 136(-4.75,10.55) 137(-5.25,10.55) 138(-5.75,10.55) 139(-6.25,10.55) 140(-6.75,10.55) 141(-7.25,10.55) 142(-7.75,10.55) 143(-8.25,10.55) 144(-8.75,10.55)
  silkscreen extent -10.9,-10.9 10.95,10.9, body extent -11,-11 11,11, height 1.71
AP7-00039 [mm] "FOX FQ5032B"
  rect 1.6x1.3 smd: 1(-1.9,-1.15) 2(1.9,-1.15) 3(1.9,1.15) 4(-1.9,1.15)
  silkscreen extent -3,-2.1 3,2.1, body extent -2.5,-1.6 2.5,1.6, height 1
CAP_C_1005X60 [mm]
  rrect50% 0.65x0.6 smd mask+0.05: 1(-0.5,0) 2(0.5,0)
  silkscreen extent -0.04,-0.3 0.04,0.3, body extent -0.5,-0.26 0.5,0.27, height 0.35
CAP_C_1608X80 [mm] "Chip Capacitor, 2-Leads, Body 1.60x0.80mm, IPC Medium Density"
  rrect50% 0.8x0.9 smd: 1(-0.8,0) 2(0.8,0)
  silkscreen extent -0.9,-0.7 0.9,0.7, body extent -0.87,-0.48 0.87,0.48, height 0.85
CAP_C_2012X110 [mm] "Chip Capacitor, 2-Leads, Body 2.00x1.25mm, IPC High Density"
  rrect41% 1.2x1.3 smd: 1(-0.9,0) 2(0.9,0)
  silkscreen extent -1.1,-0.9 1.1,0.9, body extent -1.1,-0.72 1.1,0.72, height 1.1
CAP_C_3225X80 [mm] "Chip Capacitor, 2-Leads, Body 3.20x2.50mm, IPC Medium Density"
  rrect38% 1.3x2.7 smd: 1(-1.4,0) 2(1.4,0)
  silkscreen extent -0.6,-1.35 0.6,1.35, body extent -1.7,-1.35 1.7,1.35, height 0.75
DO-214AC_SMA [mm] "Molded Diode, 2-Leads, Body 5.20x2.61mm, IPC Medium Density"
  rrect30% 2.55x1.65 smd: 1(-2.05,0) 2(2.05,0)
  silkscreen extent -3.6,-1.5 2.8,1.5, body extent -2.6,-1.3 2.6,1.3, height 2.4